# Allegro board WIFI_Rev01_22OCT17_2358.brd
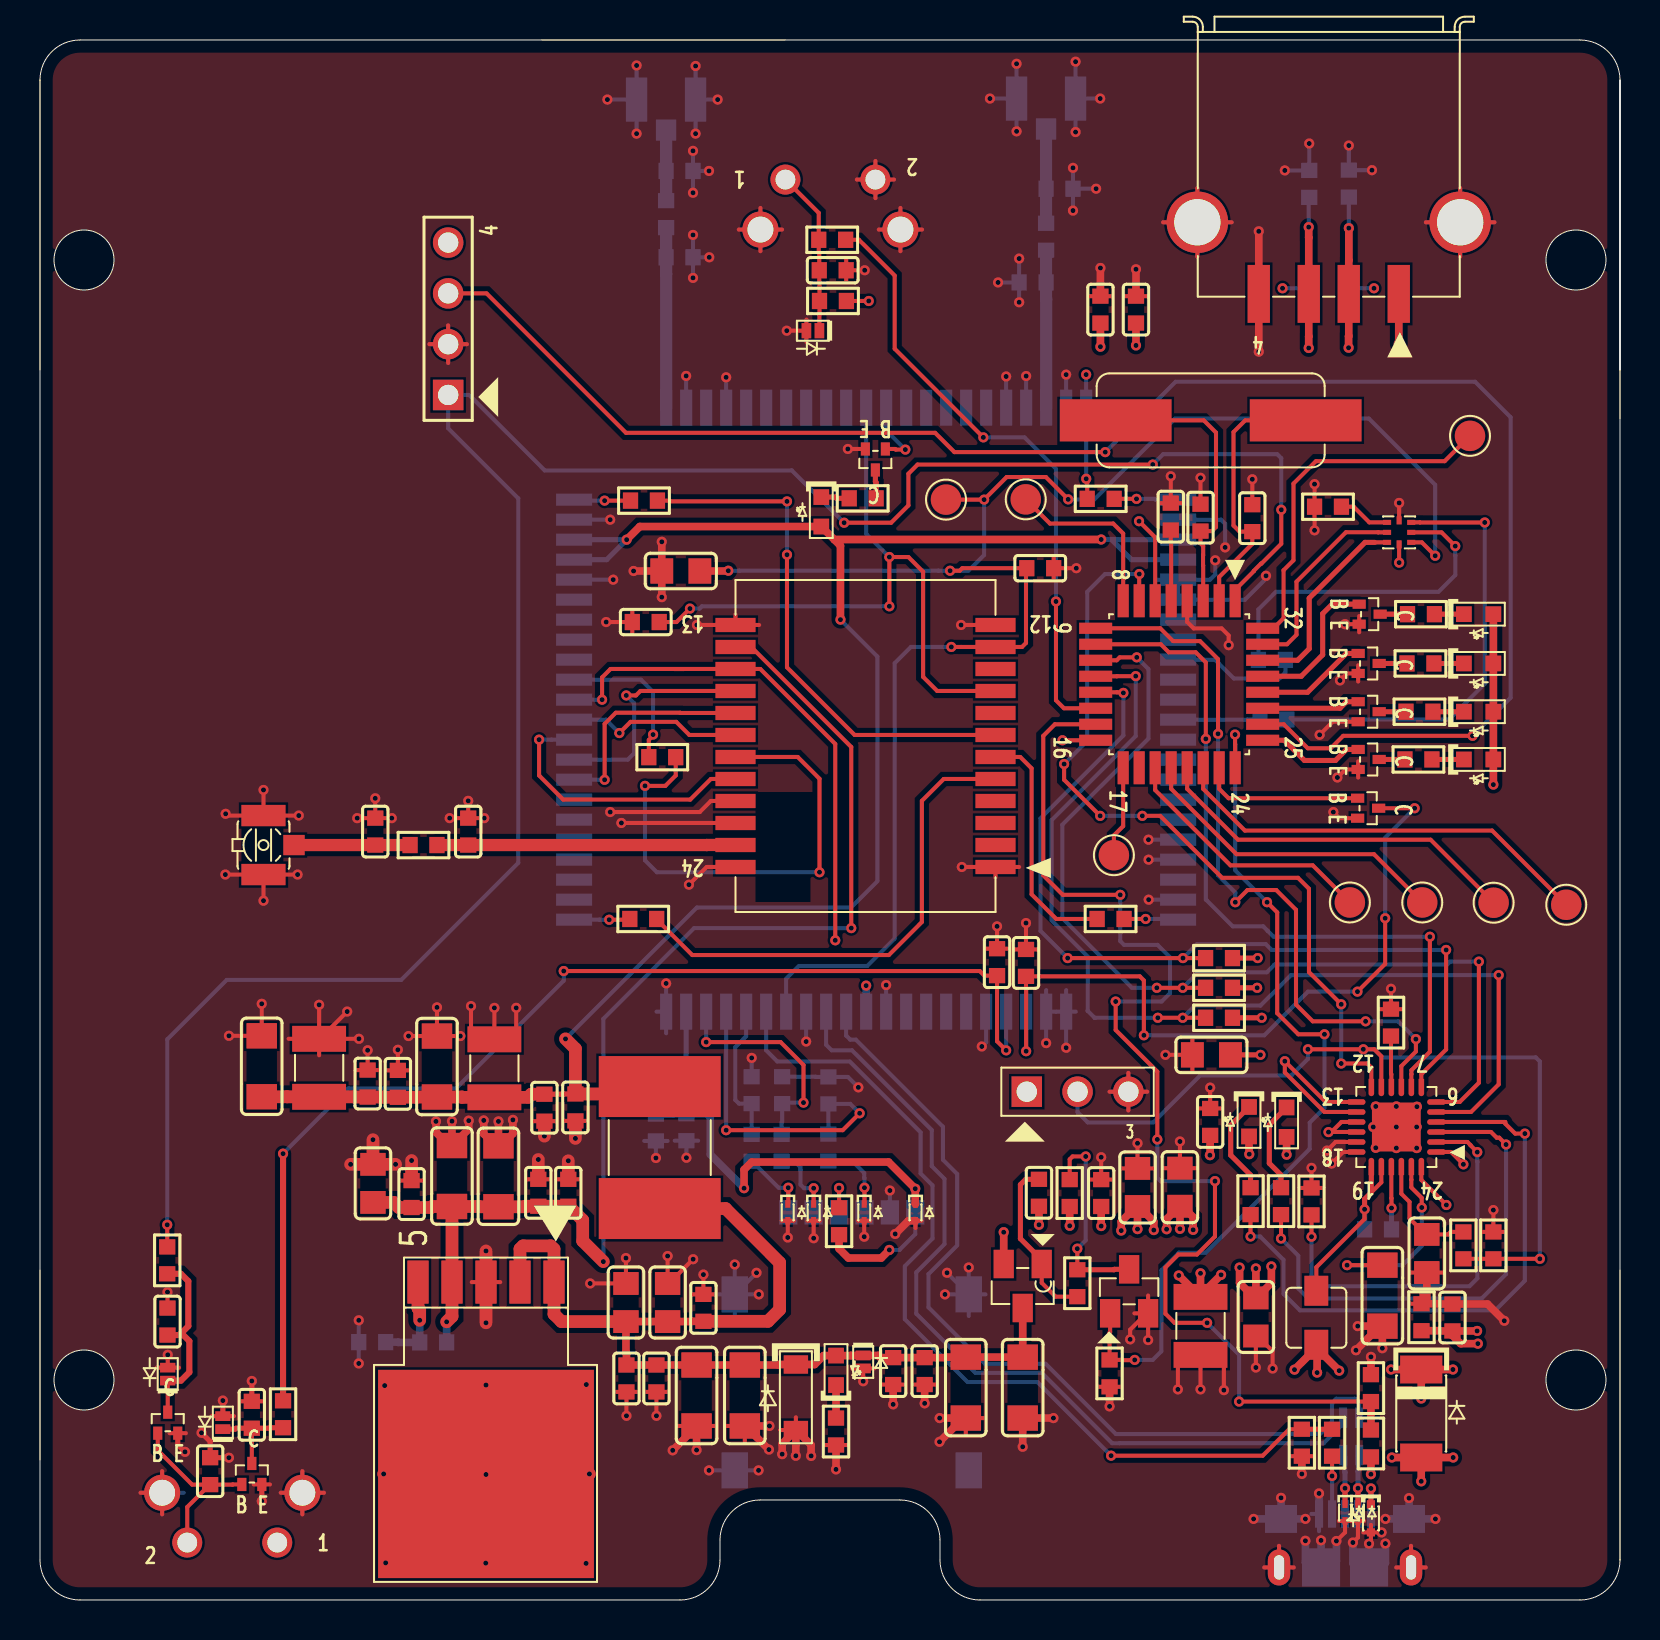
[diagram p0: board, top side]
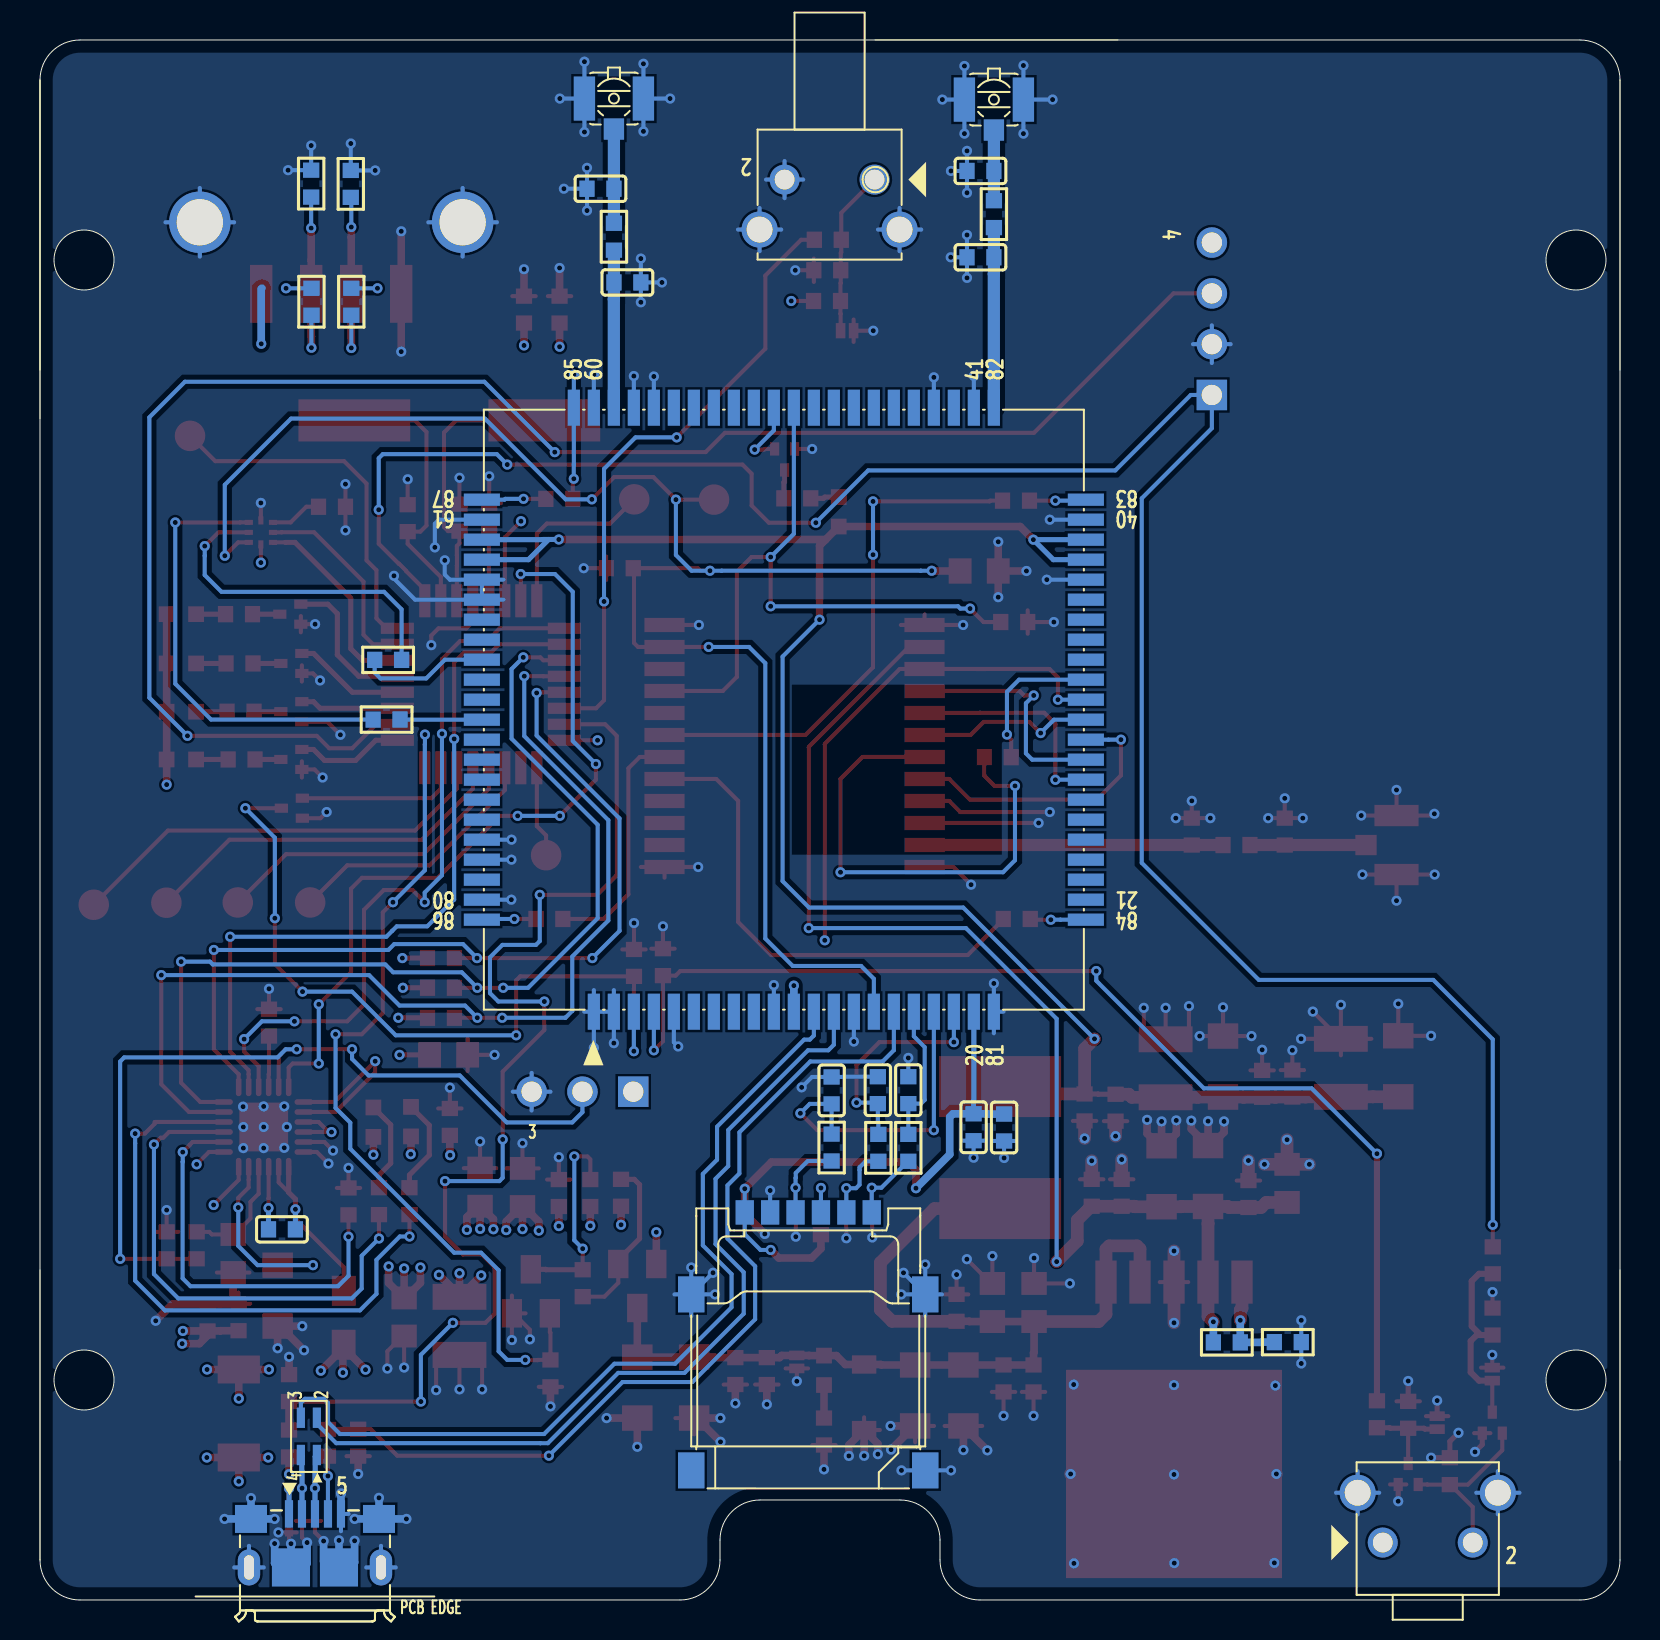
[diagram p1: board, bottom side, seen from below]

Outline 79 x 78 mm; copper layers: TOP, L2_GND, L3_PWR, BOTTOM. Coordinates in mm from the lower left corner of the outline.
Outline path: circle c2.2,67 r1.5 ; circle c2.2,11 r1.5 ; circle c76.8,67 r1.5 ; circle c76.8,11 r1.5 ; 0,76 0,61.5 ; 0,76 0,7 ; 0,76 arc(0.59,77.41) 2,78 77,78 arc(78.41,77.41) 79,76 ; 0,16.5 0,2 arc(0.59,0.59) 2,0 32,0 arc(33.41,0.59) 34,2 34,3 arc(34.59,4.41) 36,5 43,5 arc(44.41,4.41) 45,3 45,2 arc(45.59,0.59) 47,0 77,0 arc(78.41,0.59) 79,2 ; 37.25,78 25.1,78 ; 79,76 79,59.08 ; 79,76 79,61.5 ; 79,76 79,2 ; 79,2 79,16.5

## Design rules (mm)
net group CLK: nets CLK_SIM SD2_CLK USIM_CLK XIN_MCU XOUT_MCU
net group PWR: nets 3V3 BQ_BTST BQ_SW LDO_3V3_ADJ V_SIM7100 VCHARGE_FET VDD_1V8 VIN_SENSE VPP_SIM

## Placement (name value [footprint] x y rotation side)
C1  2.2uF  [C0603]  58.51 23.9 90 top
C2  0.047uF  [C0603]  66.9 18.53 0 bottom
C3  10uF  [C0805]  60.79 14.15 270 top
C4  47uF  [C1210]  58.03 13.71 270 top
C5  1uF  [C0603]  70.62 14.13 90 top
C6  8.2uF  [C1206]  67.12 15.22 270 top
C7  4.7uF  [C0805]  69.34 17.33 270 top
C8  10uF  [C0805]  58.57 27.26 180 top
C9  100uF  [C1206]  49.14 10.62 270 top
C10  100uF  [C1206]  46.29 10.62 270 top
C11  0.1uF  [C0603]  44.23 11.45 270 top
C12  33pF  [C0603]  42.66 11.45 270 top
C13  100uF  [C1206]  35.24 10.23 270 top
C14  100uF  [C1206]  32.83 10.23 270 top
C15  0.1uF  [C0603]  30.82 11.08 270 top
C16  33pF  [C0603]  29.32 11.08 270 top
C17  10uF  [C0805]  57 20.64 90 top
C18  10uF  [C0805]  54.88 20.63 90 top
C19  0.1uF  [C0603]  53.06 20.35 90 top
C20  100uF  [C1206]  20.6 21.2 90 top
C21  100uF  [C1206]  22.92 21.19 90 top
C22  0.1uF  [C0603]  24.92 20.36 90 top
C23  33pF  [C0603]  26.42 20.36 90 top
C24  10uF  [C0805]  29.3 14.87 90 top
C25  10uF  [C0805]  31.38 14.87 90 top
C26  0.1uF  [C0603]  33.17 14.61 90 top
C27  0.1uF  [C0603]  25.22 24.62 270 top
C28  100uF  [C1206]  19.85 26.67 90 top
C30  0.1uF  [C0603]  49.3 31.85 90 top
C31  0.1uF  [C0603]  47.85 31.89 90 top
C32  33pF  [C0603]  26.77 24.63 270 top
C33  47uF  [C1210]  22.72 26.58 90 top
C34  33pF  [C0603]  16.38 25.82 90 top
C35  0.1uF  [C0603]  17.89 25.81 90 top
C36  47uF  [C1210]  13.96 26.61 90 top
C37  100uF  [C1206]  11.09 26.69 90 top
C39  10uF  [C0805]  32.04 51.45 180 top
C40  0.1uF  [C0603]  30.29 48.9 180 top
C41  0.1uF  [C0603]  18.58 20.3 90 top
C42  10uF  [C0805]  16.65 20.83 90 top
C45  22pF  [C0603]  60.62 54.09 90 top
C46  22pF  [C0603]  58.03 54.12 90 top
C47  1uF  [C0603]  56.54 54.17 90 top
C48  1uF  [C0603]  54.8 64.52 90 top
C49  33pF  [C0603]  32.32 23.64 270 bottom
C50  0.1uF  [C0603]  30.8 23.62 270 bottom
C51  33pF  [C0603]  35.58 25.49 90 bottom
C52  33pF  [C0603]  37.11 25.49 90 bottom
C53  33pF  [C0603]  39.42 25.48 90 bottom
C54  0.1uF  [C0603]  6.37 13.92 90 top
C55  0.1uF  [C0603]  10.59 9.26 90 top
C56  22pF  [C0603]  31.98 67.13 0 bottom
C57  22pF  [C0603]  31.98 71.45 0 bottom
C58  22pF  [C0603]  49.63 65.88 180 bottom
C59  22pF  [C0603]  50.98 70.56 0 bottom
C60  0.1uF  [C0603]  8.51 6.44 90 top
C61  22pF  [C0603]  21.41 38.42 90 top
C62  22pF  [C0603]  16.76 38.42 90 top
C63  0.1uF  [C0603]  39.64 66.49 0 top
C64  0.1uF  [C0603]  49.95 20.36 90 top
C65  0.1uF  [C0603]  50.01 51.59 0 top
C66  0.1uF  [C0603]  53.02 64.52 90 top
D1  RED  [LED0603]  62.33 23.89 90 top
D2  RED  [LED0603]  60.45 23.92 90 top
D3  RED  [LED0603]  39.8 11.48 270 top
D4  MMSZ5231BT1G  [DIO_SOD-123_1M35]  37.79 10.14 90 top
D5  BLUE  [LED0603]  71.93 42.03 180 top
D6  BLUE  [LED0603]  71.93 44.41 180 top
D7  BLUE  [LED0603]  71.93 46.83 180 top
D8  BLUE  [LED0603]  71.93 49.29 180 top
D9  BLUE  [LED0603]  39.06 54.41 90 top
D10  PMEG3030EP,115  [DIO_SOD128_1M1]  69.06 9.32 90 top
FB1  270@100MHz  [FB2220]  30.99 22.62 90 top
HDR1  HDR_1X3_2M54  [HDR1X3_2M54_7M62X2M41X8M58_TH]  49.34 25.42 0 top
HDR2  HDR_1X4_2M54  [HDR1X4_2M54_10M16X2M41X8M58_TH]  20.41 60.25 90 top
J1  87583-3010RPALF  [CONN-TH2_87583_FCI]  64.44 65.31 180 top
J2  10118193-0001LF  [CONN-TH2_10118193_FCI]  65.25 1.63 180 bottom
J3  NANO_SIM_RYSCOON  [NANOSIM_RYSCOON]  40.59 15.28 180 bottom
J4  RECE.20279.001E.01  [CONN-SM2_RECE_TAOGLAS]  31.3 75.02 270 bottom
J5  RECE.20279.001E.01  [CONN-SM2_RECE_TAOGLAS]  50.3 75.07 270 bottom
J6  RECE.20279.001E.01  [CONN-SM2_RECE_TAOGLAS]  11.18 37.75 0 top
L1  1uH  [L_2M7_3M0X3M0X2M0]  63.82 14.11 270 top
Q2  AO3401A  [SOT-23-3_3M1X1M8X1M28]  49.14 15.7 180 top
Q3  BSS138  [SOT-23-3_2M92X1M3X1M2]  54.46 15.43 0 top
Q4  DTC123JEBTL  [TRAN_SC-89_0M85]  6.39 8.87 0 top
Q5  DTC123JEBTL  [TRAN_SC-89_0M85]  66.43 42.03 270 top
Q6  DTC123JEBTL  [TRAN_SC-89_0M85]  66.43 44.41 270 top
Q7  DTC123JEBTL  [TRAN_SC-89_0M85]  66.43 46.83 270 top
Q8  DTC123JEBTL  [TRAN_SC-89_0M85]  66.48 49.29 270 top
Q9  DTC123JEBTL  [TRAN_SC-89_0M85]  10.59 6.3 0 top
Q10  DTC123JEBTL  [TRAN_SC-89_0M85]  66.41 39.59 270 top
Q11  DTC123JEBTL  [TRAN_SC-89_0M85]  41.77 57.03 180 top
R1  75K  [R0603]  63.44 64.91 270 bottom
R2  51K  [R0603]  65.44 70.82 270 bottom
R3  51K  [R0603]  63.46 70.81 270 bottom
R4  0  [R0603]  64.6 7.86 270 top
R5  0  [R0603]  63.09 7.86 270 top
R6  43K  [R0603]  65.43 64.91 270 bottom
R9  330K  [R0603]  66.55 10.59 90 top
R10  470  [R0603]  60.53 19.94 270 top
R11  470  [R0603]  62.05 19.94 270 top
R12  10K  [R0603]  58.95 29.11 180 top
R13  10K  [R0603]  58.95 30.61 180 top
R14  10K  [R0603]  58.95 32.1 180 top
R16  5.62K  [R0603]  71.17 17.73 270 top
R18  33K  [R0603]  72.67 17.73 90 top
R19  0  [R0603]  63.58 19.93 90 top
R22  470  [R0603]  39.8 8.42 270 top
R23  10K  [R0603]  51.48 20.35 90 top
R26  100K  [R0603]  51.87 15.84 90 top
R27  33K  [R0603]  19.66 12.88 180 bottom
R28  20K  [R0603]  16.61 12.89 180 bottom
R29  0  [R0603]  61.59 47.01 0 bottom
R30  0  [R0603]  61.67 44.02 180 bottom
R31  0  [R0603]  64.4 54.66 180 top
R32  51  [R0603]  39.42 22.62 270 bottom
R33  0  [R0603]  39.95 18.94 90 top
R34  51  [R0603]  37.08 22.61 270 bottom
R35  51  [R0603]  35.58 22.61 270 bottom
R36  0  [R0603]  6.36 16.98 270 top
R37  200  [R0603]  68.92 42.03 180 top
R38  200  [R0603]  68.97 44.41 180 top
R39  200  [R0603]  69.02 46.83 180 top
R40  200  [R0603]  69.05 49.29 180 top
R41  0  [R0603]  12.15 9.29 270 top
R42  0  [R0603]  31.3 69.29 90 bottom
R43  200  [R0603]  41.13 55.08 0 top
R44  0  [R0603]  50.3 68.16 90 bottom
R45  0  [R0603]  19.18 37.75 180 top
R46  33K  [R0603]  39.65 64.95 180 top
R47  0  [R0603]  39.61 68.01 180 top
R48  150K  [R0603]  66.55 7.83 90 top
R49  330K  [R0603]  69.07 14.14 90 top
R50  160  [R0603]  67.55 28.87 90 top
R51  100K  [R0603]  53.48 11.33 270 top
R52  0  [R0603]  53.03 55.06 0 top
R53  0  [R0603]  31.11 42.14 0 top
R54  0  [R0603]  53.53 34.05 180 top
R55  0  [R0603]  30.2 54.97 0 top
R56  0  [R0603]  30.16 34.05 0 top
SW1  BTN_SPST  [SW-TH4_1825027-5_TE]  9.61 2.87 180 bottom
SW2  BTN_SPST  [SW-TH4_TL1105SF160Q_TE]  39.52 71.02 0 bottom
TP1  -  [TP]  45.3 55.02 0 top
TP2  -  [TP]  49.29 55.03 0 top
TP3  -  [TP]  76.31 34.76 0 top
TP4  -  [TP]  72.68 34.86 0 top
TP5  -  [TP]  69.11 34.88 0 top
TP6  -  [TP]  65.49 34.88 0 top
TP7  -  [TP]  53.69 37.24 0 top
TP8  -  [TP]  71.5 58.21 0 top
TVS1  PESD12VS1UB,115  [TVS_SOD-523_0M65]  66.55 4.08 90 top
TVS2  ESD9M5.0ST5G  [TVS_SOD-923_0M4]  65.9 4.37 270 top
TVS3  ESD9M5.0ST5G  [TVS_SOD-923_0M4]  65.25 4.37 270 top
TVS4  PESD5V0S1BL,315  [TVS_SOD-882_1M1]  41.16 11.9 90 top
TVS5  ESD9M5.0ST5G  [TVS_SOD-923_0M4]  38.68 19.38 270 top
TVS6  ESD9M5.0ST5G  [TVS_SOD-923_0M4]  41.21 19.38 270 top
TVS7  ESD9M5.0ST5G  [TVS_SOD-923_0M4]  43.78 19.38 270 top
TVS8  ESD9M5.0ST5G  [TVS_SOD-923_0M4]  37.39 19.38 270 top
TVS9  PESD5V0S1BL,315  [TVS_SOD-882_1M1]  6.39 11.29 270 top
TVS10  PESD5V0S1BL,315  [TVS_SOD-882_1M1]  9.14 8.87 270 top
TVS11  PESD5V0S1BL,315  [TVS_SOD-882_1M1]  38.65 63.46 0 top
U1  DLW21SR670HQ2L  [FL0805_1M4]  65.56 8.18 90 bottom
U2  BQ24296RGET  [VQFN24_0M5_4M0X4M0X1M0]  67.82 23.65 180 top
U4  SPX29302T5-L/TR  [TO263-5]  22.3 6.3 90 top
U5  SIM7100C  [MODULE_SIM7100C]  41.81 44.52 90 bottom
U6  W57  [MODULE_W57]  41.27 42.7 180 top
U7  FXLA102L8X  [MICROPAK8_0M5_1M6X1M6X0M55]  67.96 53.38 90 top
U8  STM8S103K3T6C  [LQFP32_0M8_7M0X7M0X1M6]  56.96 45.79 270 top
Y1  ABLS-8.000MHZ-B4-T  [XTAL2_HC49US_4M2]  58.53 58.98 180 top

## Library data of the parts
C1 = CAP_2.2uF
C2 = CAP_0.047uF_09012017
C3 C8 C17 C18 C24 C25 C39 C42 = CAP_10uF
C4 C33 C36 = CAP_47uF
C5 C47 C48 = CAP_1uF
C6 = CAP_8.2uF_09012017
C7 = CAP_4.7uF
C9 C10 C13 C14 C20 C21 C28 C37 = CAP_100uF
C11 C15 C19 C22 C26 C27 C30 C31 C35 C40 C41 C50 C54 C55 C60 C63-C66 = CAP_100nF
C12 C16 C23 C32 C34 C49 C51-C53 = CAP_33pF
C45 C46 C56-C59 C61 C62 = CAP_22pF
D1-D3 = LED_LTST-C193KRKT-5A
D4 = DIODE_ZENER_5V1
D5-D9 = LED_LTST-C193TBKT-5A
D10 = DIO_PMEG3030EP_SOD128
FB1 = FB2220_270OHM_4A
HDR1 = HDR_1X3_68000
HDR2 = HDR_1X4_68000
J1 = CONN_USB_TYPEA
J2 = CONN_USB
J3 = CONN_SIM
J4-J6 = CONN_AT
L1 = IND_1.5uH
Q2 = FET_P_AO3401A_SOT23
Q3 = FET_N_BSS138_SOT23
Q4-Q11 = BJT_NPN_DTC143ZEBTL
R1 = RES_75K_N
R2 R3 = RES_51K_N
R4 R5 R19 R29-R31 R33 R36 R41 R42 R44 R45 R47 R52-R56 = RES_0
R6 = RES_43K_N
R9 R49 = R0402_330K_1/16W_1%
R10 R11 R22 = RES_470_09012017
R12-R14 R23 = RES_10K
R16 = RES_5.62K
R18 R27 R46 = RES_33K_1%
R26 R51 = R0402_100K_1/10W_5%
R28 = RES_20K
R32 R34 R35 = RES_51
R37-R40 R43 = RES_200_09012017
R48 = RES_150K_1%
R50 = RES_160_1%
SW1 = BTN4_SPST_TH_1825027-5
SW2 = BTN4_SPST_TH_TL1105SF160Q
TP1-TP8 = TP
TVS1 = TVS_PESD12VS1UB
TVS2 TVS3 TVS5-TVS8 = TVS_ESD9M5.0S-D
TVS4 TVS9-TVS11 = TVS_PESD5V0S1BL
U1 = FILTER_CHOKES_DLW21SN670SQ2
U2 = IC_BQ24296
U4 = IC_SPX29302T5-L
U5 = IC_SIM7100
U6 = IC_W57
U7 = IC_FXLA102
U8 = IC_STM8S103K3T6C
Y1 = XTAL_8MHz

## Footprints (pads in the part's own frame, mm; a bottom-side part is the same pattern mirrored in y, then rotated)
C0603
  rect 0.762x0.813 smd: 1(-0.673,0) 2(0.673,0)
C0805
  rect 1.143x1.27 smd: 1(-0.953,0) 2(0.953,0)
C1206
  rect 1.27x1.524 smd: 1(-1.524,0) 2(1.524,0)
C1210
  rect 1.295x2.692 smd: 1(-1.45,0) 2(1.45,0)
CONN-SM2_RECE_TAOGLAS
  rect 2.21x1.067 smd: 1(0,1.475) 3(0,-1.475)
  rect 1.067x1.016 smd: 2(1.525,0)
CONN-TH2_87583_FCI
  rect 1.118x2.896 smd: 1(-3.5,0) 2(-1,0) 3(1,0) 4(3.5,0)
  round 3.073 hole 2.311: 5(-6.57,-3.58) 6(6.57,-3.58)
CONN-TH2_10118193_FCI
  rect 0.406x1.372 smd: 1(-1.3,2.675) 2(-0.65,2.675) 3(0,2.675) 4(0.65,2.675) 5(1.3,2.675)
  rect 1.6x1.397 smd: 6(-3.2,2.425) 7(3.2,2.425)
  rect 1.905x1.905 smd: 8(-1.2,0) 9(1.2,0)
  oval 1.118x1.803 hole 0.508x1.219: 10(-3.3,0) 11(3.3,0)
DIO_SOD128_1M1
  rect 1.397x2.108 smd: A(-2.2,0) K(2.2,0)
DIO_SOD-123_1M35
  rect 0.914x1.219 smd: A(-1.638,0) K(1.638,0)
FB2220
  rect 3.048x6.096 smd: 1(-3.05,0) 2(3.05,0)
FL0805_1M4
  rect 1.016x0.406 smd: 1(-0.931,-0.4) 2(0.931,-0.4) 3(0.931,0.4) 4(-0.931,0.4)
HDR1X3_2M54_7M62X2M41X8M58_TH
  rect 1.524x1.524 hole 1.016: 1(0,0)
  round 1.524 hole 1.016: 2(2.54,0) 3(5.08,0)
HDR1X4_2M54_10M16X2M41X8M58_TH
  rect 1.524x1.524 hole 1.016: 1(0,0)
  round 1.524 hole 1.016: 2(2.54,0) 3(5.08,0) 4(7.62,0)
L_2M7_3M0X3M0X2M0
  rect 1.499x1.194 smd: 1(-1.35,0) 2(1.35,0)
LED0603
  rect 0.787x0.787 smd: A(-0.737,0) K(0.737,0)
LQFP32_0M8_7M0X7M0X1M6
  rect 1.651x0.559 smd: 1(-4.175,2.8) 2(-4.175,2) 3(-4.175,1.2) 4(-4.175,0.4) 5(-4.175,-0.4) 6(-4.175,-1.2) 7(-4.175,-2) 8(-4.175,-2.8) 17(4.175,-2.8) 18(4.175,-2) 19(4.175,-1.2) 20(4.175,-0.4) 21(4.175,0.4) 22(4.175,1.2) 23(4.175,2) 24(4.175,2.8)
  rect 0.559x1.651 smd: 9(-2.8,-4.175) 10(-2,-4.175) 11(-1.2,-4.175) 12(-0.4,-4.175) 13(0.4,-4.175) 14(1.2,-4.175) 15(2,-4.175) 16(2.8,-4.175) 25(2.8,4.175) 26(2,4.175) 27(1.2,4.175) 28(0.4,4.175) 29(-0.4,4.175) 30(-1.2,4.175) 31(-2,4.175) 32(-2.8,4.175)
MICROPAK8_0M5_1M6X1M6X0M55
  rect 0.254x0.406 smd: 1(-0.5,-0.605) 2(0,-0.605) 3(0.5,-0.605) 5(0.5,0.605) 6(0,0.605) 7(-0.5,0.605)
  rect 0.406x0.254 smd: 4(0.6,0) 8(-0.6,0)
MODULE_SIM7100C
  rect 1.803x0.61 smd: 1(-15.1,9.5) 2(-15.1,8.5) 3(-15.1,7.5) 4(-15.1,6.5) 5(-15.1,5.5) 6(-15.1,4.5) 7(-15.1,3.5) 8(-15.1,2.5) 9(-15.1,1.5) 10(-15.1,0.5) 11(-15.1,-0.5) 12(-15.1,-1.5) 13(-15.1,-2.5) 14(-15.1,-3.5) 15(-15.1,-4.5) 16(-15.1,-5.5) 17(-15.1,-6.5) 18(-15.1,-7.5) 19(-15.1,-8.5) 20(-15.1,-9.5) 41(15.1,-9.5) 42(15.1,-8.5) 43(15.1,-7.5) 44(15.1,-6.5) 45(15.1,-5.5) 46(15.1,-4.5) 47(15.1,-3.5) 48(15.1,-2.5) 49(15.1,-1.5) 50(15.1,-0.5) 51(15.1,0.5) 52(15.1,1.5) 53(15.1,2.5) 54(15.1,3.5) 55(15.1,4.5) 56(15.1,5.5) 57(15.1,6.5) 58(15.1,7.5) 59(15.1,8.5) 60(15.1,9.5) 81(-15.1,-10.5) 82(15.1,-10.5) 85(15.1,10.5)
  rect 0.61x1.803 smd: 21(-9.5,-15.1) 22(-8.5,-15.1) 23(-7.5,-15.1) 24(-6.5,-15.1) 25(-5.5,-15.1) 26(-4.5,-15.1) 27(-3.5,-15.1) 28(-2.5,-15.1) 29(-1.5,-15.1) 30(-0.5,-15.1) 31(0.5,-15.1) 32(1.5,-15.1) 33(2.5,-15.1) 34(3.5,-15.1) 35(4.5,-15.1) 36(5.5,-15.1) 37(6.5,-15.1) 38(7.5,-15.1) 39(8.5,-15.1) 40(9.5,-15.1) 61(9.5,15.1) 62(8.5,15.1) 63(7.5,15.1) 64(6.5,15.1) 65(5.5,15.1) 66(4.5,15.1) 67(3.5,15.1) 68(2.5,15.1) 69(1.5,15.1) 70(0.5,15.1) 71(-0.5,15.1) 72(-1.5,15.1) 73(-2.5,15.1) 74(-3.5,15.1) 75(-4.5,15.1) 76(-5.5,15.1) 77(-6.5,15.1) 78(-7.5,15.1) 79(-8.5,15.1) 80(-9.5,15.1) 83(10.5,-15.1) 84(-10.5,-15.1) 86(-10.5,15.1) 87(10.5,15.1)
MODULE_W57
  rect 2.007x0.711 smd: 1(-6.5,6.05) 2(-6.5,4.95) 3(-6.5,3.85) 4(-6.5,2.75) 5(-6.5,1.65) 6(-6.5,0.55) 7(-6.5,-0.55) 8(-6.5,-1.65) 9(-6.5,-2.75) 10(-6.5,-3.85) 11(-6.5,-4.95) 12(-6.5,-6.05) 13(6.5,-6.05) 14(6.5,-4.95) 15(6.5,-3.85) 16(6.5,-2.75) 17(6.5,-1.65) 18(6.5,-0.55) 19(6.5,0.55) 20(6.5,1.65) 21(6.5,2.75) 22(6.5,3.85) 23(6.5,4.95) 24(6.5,6.05)
NANOSIM_RYSCOON
  rect 0.914x1.219 smd: C1(-3.175,4.1) C2(-0.635,4.1) C3(1.905,4.1) C5(-1.905,4.1) C6(0.635,4.1) C7(3.175,4.1)
  rect 1.321x1.803 smd: G1(-5.85,0) G2(5.85,0) G3(5.85,-8.8) SW(-5.85,-8.8)
R0603
  rect 0.762x0.813 smd: 1(-0.673,0) 2(0.673,0)
SOT-23-3_2M92X1M3X1M2
  rect 1.016x1.422 smd: D(0,1.1) G(-0.95,-1.1) S(0.95,-1.1)
SOT-23-3_3M1X1M8X1M28
  rect 1.016x1.422 smd: D(0,1.1) G(-0.95,-1.1) S(0.95,-1.1)
SW-TH4_1825027-5_TE
  round 1.499 hole 0.991: 1(-2.25,0) 2(2.25,0)
  round 1.803 hole 1.295: 3(-3.505,2.489) 4(3.505,2.489)
SW-TH4_TL1105SF160Q_TE
  round 1.499 hole 0.991: 1(-2.25,0) 2(2.25,0)
  round 1.803 hole 1.295: 3(-3.5,2.5) 4(3.5,2.5)
TO263-5
  rect 2.159x1.067 smd: 1(9.593,-3.4) 2(9.593,-1.7) 3(9.593,0) 4(9.593,1.7) 5(9.593,3.4)
  rect 10.414x10.795 smd: 6(0,0)
TP
  round 1.524 smd: 1(0,0)
TRAN_SC-89_0M85
  rect 0.457x0.66 smd: B(-0.5,-0.525) C(0,0.525) E(0.5,-0.525)
TVS_SOD-523_0M65
  rect 0.406x0.406 smd: 1(0.7,0) 2(-0.7,0)
TVS_SOD-882_1M1
  rect 0.483x0.762 smd: 1(0.325,0) 2(-0.325,0)
TVS_SOD-923_0M4
  rect 0.381x0.254 smd: 1(-0.42,0) 2(0.42,0)
VQFN24_0M5_4M0X4M0X1M0
  custom 0.864x0.279 smd: 1(-1.975,1.25) 2(-1.975,0.75) 3(-1.975,0.25) 4(-1.975,-0.25) 5(-1.975,-0.75) 6(-1.975,-1.25) 13(1.975,-1.25) 14(1.975,-0.75) 15(1.975,-0.25) 16(1.975,0.25) 17(1.975,0.75) 18(1.975,1.25)
  custom 0.279x0.864 smd: 7(-1.25,-1.975) 8(-0.75,-1.975) 9(-0.25,-1.975) 10(0.25,-1.975) 11(0.75,-1.975) 12(1.25,-1.975) 19(1.25,1.975) 20(0.75,1.975) 21(0.25,1.975) 22(-0.25,1.975) 23(-0.75,1.975) 24(-1.25,1.975)
  rect 2.438x2.438 smd: 25(0,0)
XTAL2_HC49US_4M2
  rect 5.588x2.108 smd: 1(-4.75,0) 2(4.75,0)

## Nets
3V3: C20.1 C21.1 C22.1 C23.1 C41.1 C42.1 R27.1 U4.4(OUT) U6.14(WLAN_3V3)
GND: C1.2 C3.2 C4.2 C5.2 C6.2 C7.2 C8.2 C9.2 C10.2 C11.2 C12.2 C13.2 C14.2 C15.2 C16.2 C17.2 C18.2 C19.2 C20.2 C21.2 C22.2 C23.2 C24.2 C25.2 C26.2 C27.2 C28.2 C30.2 C31.2 C32.2 C33.2 C34.2 C35.2 C36.2 C37.2 C39.2 C40.2 C41.2 C42.2 C45.2 C46.2 C47.2 C48.2 C49.2 C50.2 C51.2 C52.2 C53.2 C54.2 C55.2 C56.2 C57.2 C58.2 C59.2 C60.2 C61.2 C62.2 C63.2 C65.2 C66.2 D4.A HDR1.3 HDR2.2 J1.4 J1.5(SHIELD_1) J1.6(SHIELD_2) J2.5 J2.6 J2.7 J2.8 J2.9 J2.10 J2.11 J3.C5(GND) J3.G1(GND1) J3.G2(GND2) J3.G3(GND3) J4.1(GND_1) J4.3(GND_3) J5.1(GND_1) J5.3(GND_3) J6.1(GND_1) J6.3(GND_3) Q3.S Q4.E(GND) Q5.E(GND) Q6.E(GND) Q7.E(GND) Q8.E(GND) Q9.E(GND) Q10.E(GND) Q11.E(GND) R2.1 R3.1 R5.2 R9.2 R18.2 R19.2 R22.2 R28.2 R31.2 R49.2 R50.2 R51.2 SW1.3 SW1.4 SW2.2 SW2.3 SW2.4 TVS1.2 TVS2.2 TVS3.2 TVS4.2 TVS5.2 TVS6.2 TVS7.2 TVS8.2 TVS9.2 TVS10.2 TVS11.2 U2.17(PGND_1) U2.18(PGND_2) U2.25(PAD) U4.3(GND) U4.6(PAD) U5.1(GND_1) U5.2(GND_2) U5.5(GND_3) U5.10(GND_4) U5.14(GND_5) U5.37(GND_6) U5.40(GND_7) U5.41(GND_8) U5.43(GND_9) U5.57(GND_10) U5.58(GND_11) U5.60(GND_12) U5.61(GND_13) U5.64(GND_14) U5.65(GND_15) U5.77(GND_16) U5.78(GND_17) U5.80(GND_18) U5.81(GND_19) U6.1(GND_1) U6.12(GND_2) U6.13(GND_6) U6.21(GND_5) U6.22(GND_4) U6.24(GND_3) U7.4(GND) U8.4(VSS)
VBAT: C8.1 C48.1 C66.1 HDR1.1 HDR2.4 R12.1 R13.1 R14.1 R46.1 SW1.1 U2.13(BAT_1) U2.14(BAT_2) U7.8(VCCB) U8.6(VDD) U8.16(PB0)
VDD_1V8: C39.1 C65.1 TP1.1(TP) U5.15(VDD_1V8) U6.11(VIO) U7.1(VCCA)
VIN_SENSE: R9.1 R48.2 U8.15(PB1)
BJT_NETLIGHT: Q11.C(OUT) R43.2
BOOT_CFG0: R52.1 U5.85(B00T_CFG0)
BOOT_CFG1: R52.2 U5.87(B00T_CFG1)
BQ_BTST: C2.2 U2.21(BTST)
BQ_CE: U2.9(C\E\) U8.9(PB7)
BQ_ILIM: R50.1 U2.10(ILIM)
BQ_INT: R14.2 U2.7(INT) U8.13(PB3)
BQ_OTG: U2.8(OTG) U8.10(PB6)
BQ_PG: R11.2 U2.3(P\G\)
BQ_PG_LED: D1.K(CATHODE) R11.1
BQ_PMID: C6.1 U2.23(PMID)
BQ_PSEL: R19.1 U2.2(PSEL)
BQ_QON: U2.12(QON) U8.7(PA3)
BQ_REGN: C7.1 R16.1 U2.22(REGN)
BQ_SCL: R12.2 U2.5(SCL) U8.12(PB4)
BQ_SDA: R13.2 U2.6(SDA) U8.11(PB5)
BQ_STAT: R10.2 U2.4(STAT)
BQ_STAT_LED: D2.K(CATHODE) R10.1
BQ_SW: C2.1 L1.1 U2.19(SW_1) U2.20(SW_2)
BQ_TS: HDR1.2 R16.2 R18.1 U2.11(TS)
CHAR_OTG_DN: J1.3 R1.2 R3.2
CHAR_OTG_DP: J1.2 R2.2 R6.2
CLK_SIM: J3.C3(CLK) R34.2 TVS5.1
DIV_ANT: C58.1 R44.1 U5.59(AUX_ANT)
FET_CAP_G: C64.2 Q2.G R26.1
FET_PW_G: Q3.D R23.2 R26.2
FXLA_OE: R31.1 U7.5(OE)
IO_SIM: J3.C7(I/O) R35.2 TVS8.1
LDO_3V3_ADJ: R27.2 R28.1 U4.5(ADJ)
LED1: Q5.B(IN) U8.25(PD0)
LED1_BJT: Q5.C(OUT) R37.2
LED1_K: D5.K(CATHODE) R37.1
LED2: Q6.B(IN) U8.27(PD2)
LED2_BJT: Q6.C(OUT) R38.2
LED2_K: D6.K(CATHODE) R38.1
LED3: Q7.B(IN) U8.28(PD3)
LED3_BJT: Q7.C(OUT) R39.2
LED3_K: D7.K(CATHODE) R39.1
LED4: Q8.B(IN) U8.29(PD4)
LED4_BJT: Q8.C(OUT) R40.2
LED4_K: D8.K(CATHODE) R40.1
LED_NETLIGHT: D9.K(CATHODE) R43.1
LED_PW: D3.K(CATHODE) R22.1
LTE_ACTIVE: R54.2 U6.6(LTE_ACTIVE)
LTE_FRAME_SYNC: R56.2 U6.5(LTE_FRAME_SYNC)
LTE_WLAN_PRIORITY: R55.2 U6.7(LTE_WLAN_PRIORITY)
MAIN_ANT: C56.1 R42.1 U5.82(MAIN_ANT)
NETLIGHT: Q11.B(IN) U5.51(NETLIGHT)
PC2_MCU: TP6.1(TP) U8.19(PC2)
PC3_MCU: TP5.1(TP) U8.20(PC3)
PC4_MCU: TP4.1(TP) U8.21(PC4)
PC5_MCU: TP3.1(TP) U8.22(PC5)
PD7_MCU: TP8.1(TP) U8.32(PD7)
PE5_MCU: TP7.1(TP) U8.17(PE5)
PF4_MCU: TP2.1(TP) U8.8(PF4)
POWER_MCU: R47.1 U8.14(PB2)
PW_BUTTON: C63.1 R46.2 R47.2 SW2.1 TVS11.1
PWRKEY: C30.1 Q10.C(OUT) U5.3(PWRKEY)
PWRKEY_MCU: Q10.B(IN) U8.23(PC6)
RESET: C31.1 R41.1 U5.4(RESET)
RESET_MCU: HDR2.1 R36.1 U8.1(NRST)
RF_ANT: C61.1 R45.1 U6.23(RF_ANT)
RST_BUTTON: C60.1 Q4.B(IN) Q9.B(IN) SW1.2
RST_MCU: C54.1 Q4.C(OUT) R36.2 TVS9.1
RST_SIM: J3.C2(RST) R32.2 TVS6.1
RST_SIM7100: C55.1 Q9.C(OUT) R41.2 TVS10.1
RX_1V8: R29.1 U7.2(A0)
RX_3V3: U7.6(B1) U8.31(PD6)
SD2_CLK: R53.2 U6.19(SDIO_CLK)
SD2_CMD: U5.29(KBR0) U6.20(SDIO_CMD)
SD2_D0: U5.30(KBR2) U6.18(SDIO_D0)
SD2_D1: U5.27(KBC1) U6.17(SDIO_D1)
SD2_D2: U5.28(KBC0) U6.16(SDIO_D2)
SD2_D3: U5.31(KBC2) U6.15(SDIO_D3)
SIG_DIV_ANT: C59.1 J5.2(SIGNAL) R44.2
SIG_MAIN_ANT: C57.1 J4.2(SIGNAL) R42.2
SIG_WIFI_ANT: C62.1 J6.2(SIGNAL) R45.2
SIM7100_COEX1: R55.1 U5.83(COEX1)
SIM7100_COEX2: R56.1 U5.84(COEX2)
SIM7100_COEX3: R54.1 U5.86(COEX3)
SWIM_MCU: HDR2.3 U8.26(PD1)
TX_1V8: R30.1 U7.3(A1)
TX_3V3: U7.7(B0) U8.30(PD5)
UART_RX: R29.2 U5.68(RXD)
UART_TX: R30.2 U5.71(TXD)
USB_DN: U1.3 U5.12(USB_DN)
USB_DN_CONN: J2.2 TVS2.1 U1.4
USB_DP: U1.2 U5.13(USB_DP)
USB_DP_CONN: J2.3 TVS3.1 U1.1
USB_ID: R4.1 R5.1 U5.16(USB_ID)
USB_ID_CONN: J2.4 R4.2
USB_VDD5V: D10.A J2.1 R48.1 TVS1.1 U5.11(USB_VBUS)
USIM_CLK: C52.1 R34.1 U5.19(USIM_CLK)
USIM_DATA: C51.1 R35.1 U5.17(USIM_DATA)
USIM_RST: C53.1 R32.1 U5.18(USIM_RST)
USIM_VDD: C49.1 C50.1 J3.C1(VCC) R33.1 TVS7.1 U5.20(USIM_VDD)
V_SIM7100: C27.1 C28.1 C32.1 C33.1 C34.1 C35.1 C36.1 C37.1 D9.A(ANODE) FB1.2 U5.38(VBAT_1) U5.39(VBAT_2) U5.62(VBAT_3) U5.63(VBAT_4)
VCAP_MCU: C47.1 U8.5(VCAP)
VCHARGE_EN: Q3.G R51.1 U8.24(PC7)
VCHARGE_FET: C9.1 C10.1 C11.1 C12.1 C13.1 C14.1 C15.1 C16.1 C24.1 C25.1 C26.1 D3.A(ANODE) D4.K FB1.1 Q2.D TVS4.1 U4.1(EN) U4.2(IN)
VCHARGE_OUT: C1.1 C3.1 C4.1 C17.1 C18.1 C19.1 C64.1 D1.A(ANODE) D2.A(ANODE) D5.A(ANODE) D6.A(ANODE) D7.A(ANODE) D8.A(ANODE) L1.2 Q2.S R23.1 U2.15(SYS_1) U2.16(SYS_2)
VPP_SIM: J3.C6(VPP) R33.2
VUSB_IN: C5.1 D10.K J1.1 R1.1 R6.1 R49.1 U2.1(VBUS_1) U2.24(VBUS_2)
WLAN_RST_N: C40.1 U5.50(GPIO43) U6.9(WLAN_RESET_N)
XIN_MCU: C45.1 U8.2(OSCIN) Y1.1
XOUT_MCU: C46.1 U8.3(OSCOUT) Y1.2
N19042876: R53.1 U5.32(KBC3)

Pads without a net: J3 SW; U5 6 7 8 9 21 22 23 24 25 26 33 34 35 36 42 44 45 46 47 48 49 52 53 54 55 56 66 67 69 70 72 73 74 75 76 79; U6 2 3 4 8 10; U8 18

## Via types
v1: diameter 0.508, hole 0.254, TOP to BOTTOM, 397 vias

## Routing (per net, layer and track width the routed paths; a pad name or vN(x,y) marks a point on that pad's centre or on a via; arc(x,y) is an arc through that point)
3V3: length 63.7
  TOP w0.203: U6.14 35.56,47.65 40.56,42.65 v1(40.56,33.59)
  TOP w0.635: C42.1 17.69,19.88 17.94,19.62 C41.1 19.56,19.62 19.61,19.67 C20.1 ; v1(28.17,16.92) 27.14,17.95 27.14,18.99 26.44,19.69 C23.1 C22.1 24.28,19.69 24.26,19.66 C21.1 21.93,19.66 21.92,19.67 C20.1 ; C20.1 20.6,18.81 20.6,18.81 U4.4 20.6,14.18 v1(20.33,13.91)
  BOTTOM w0.203: v1(28.17,16.92) 28.17,29.06 32.7,33.59 v1(40.56,33.59)
  BOTTOM w0.381: R27.1 v1(20.33,13.91)
GND: length 592.7
  TOP w0.203: TVS1.2 66.55,3.76 ; TVS1.2 v1(67.08,3.38) ; TVS1.2 66.55,3 ; TVS1.2 66.17,3.38 ; R50.2 68.13,29.54 ; R50.2 v1(67.55,30.56) ; R50.2 66.97,29.54 ; v1(32.45,35.77) 33.33,36.65 U6.24 ; C62.2 v1(15.86,39.09) ; C62.2 v1(17.59,39.09) ; C62.2 v1(16.76,40.08) ; v1(29.07,38.85) 29.07,38.85 U6.22 ; v1(23.81,29.61) 23.81,28.49 23.36,28.03 C33.2 ; 62.51,7.19 R5.2 63.68,7.19 ; C16.2 v1(29.32,9.21) ; C16.2 29.91,10.4 ; C16.2 28.74,10.4 ; SW2.2 42.7,71.02 ; SW2.2 41.77,71.95 ; SW2.2 41.77,70.09 ; SW2.2 40.84,71.02 ; C19.2 53.64,21.02 ; C19.2 52.48,21.02 ; C19.2 v1(53.06,22.14) ; U6.12 v1(46.05,48.75) ; 9.7,9.19 TVS10.2 8.58,9.19 ; C14.2 33.77,8.7 ; C14.2 31.89,8.7 ; C14.2 32.83,8.68 ; C40.2 v1(28.31,48.9) ; C40.2 29.62,48.31 ; C40.2 29.62,49.48 ; 19.16,20.97 C41.2 17.99,20.97 ; Q6.E 64.64,43.91 v1(63.98,43.26) ; C45.2 v1(60.62,56.04) ; 24.33,21.03 C22.2 25.5,21.03 ; TVS4.2 v1(41.16,10.94) ; TVS4.2 41.72,11.58 ; TVS4.2 40.6,11.58 ; 69.07,15.37 R49.2 68.49,14.81 ; 40.31,65.9 C63.2 ; C63.2 v1(41.24,66.49) ; C63.2 40.31,67.07 ; 12.04,5.36 SW1.3 ; SW1.3 14.2,5.36 ; SW1.3 13.12,6.44 ; SW1.3 13.12,4.28 ; 17.31,26.48 C35.2 ; C35.2 v1(17.89,27.51) ; C35.2 18.48,26.48 ; 11.18,9.93 C55.2 10.01,9.93 ; J6.1 v1(12.94,39.22) ; J6.1 9.37,39.22 v1(9.28,39.31) ; J6.1 v1(11.18,40.5) ; 55.96,54.84 C47.2 ; C47.2 57.12,54.84 ; C47.2 v1(56.54,56.19) ; v1(29.3,17.1) 29.3,15.83 v1(27.51,15.83) ; v1(56.9,10.53) 56.9,12.08 57.07,12.26 C4.2 ; 54.42,24.48 HDR1.3 ; HDR1.3 53.48,25.42 ; HDR1.3 55.36,25.42 ; HDR1.3 54.42,26.36 ; v1(63.73,53.48) R31.2 v1(63.73,55.79) ; 34.94,68.52 SW2.3 ; SW2.3 36.02,69.6 ; SW2.3 37.1,68.52 ; SW2.3 36.02,67.44 ; v1(67.82,23.65) v1(66.79,24.68) ; v1(67.82,23.65) v1(68.83,23.65) ; v1(67.82,23.65) 68.83,24.67 v1(68.85,24.67) ; v1(67.82,23.65) v1(66.66,23.65) ; v1(67.82,23.65) 68.83,22.63 v1(68.83,22.6) ; v1(67.82,23.65) v1(67.82,22.6) ; v1(67.82,23.65) v1(67.82,24.68) ; v1(67.82,23.65) 66.79,22.62 v1(66.79,22.61) ; 50.68,51.01 C65.2 ; C65.2 50.68,52.17 ; C65.2 v1(51.82,51.59) ; C18.2 v1(54.88,22.84) ; C18.2 54.06,21.58 ; C18.2 55.69,21.58 ; 6.48,8.34 Q4.E 7.29,8.34 ; 56.18,21.59 C17.2 ; C17.2 v1(57,22.93) ; C17.2 57.81,21.59 ; HDR2.2 21.35,62.79 ; HDR2.2 19.47,62.79 ; HDR2.2 20.41,61.85 ; HDR2.2 20.41,63.73 ; 57.87,67.17 J1.6 ; J1.6 57.87,70.6 ; J1.6 59.58,68.89 ; J1.6 56.15,68.89 ; 64.95,3.95 TVS3.2 ; TVS3.2 65.25,3.38 v1(64.82,2.95) ; TVS3.2 65.56,3.95 ; J2.10 68.55,2.71 ; J2.10 67.82,1.63 ; J2.10 69.29,1.63 ; C46.2 v1(58.03,56.11) ; 53.61,65.19 C66.2 52.44,65.19 ; 43.65,10.77 C11.2 44.82,10.77 ; 34.3,8.7 C13.2 ; C13.2 35.24,7.89 ; C13.2 35.27,8.7 ; J2.11 62.69,1.63 ; J2.11 61.22,1.63 ; J2.11 61.95,2.71 ; R18.2 v1(72.67,19.5) ; R18.2 73.25,18.4 ; R18.2 72.08,18.4 ; U6.13 35.96,48.75 ; U6.13 34.77,49.28 ; U6.13 v1(32.85,48.75) ; 40.39,7.75 R22.2 39.22,7.75 ; v1(11.09,29.81) C37.2 v1(9.45,28.21) ; 5.83,11.62 TVS9.2 ; TVS9.2 6.95,11.62 ; TVS9.2 v1(6.39,12.26) ; TVS6.2 41.52,18.96 ; TVS6.2 v1(41.21,18.16) ; TVS6.2 40.91,18.96 ; Q10.E 64.98,39.09 v1(64.67,39.4) ; 25.81,23.94 C27.2 24.64,23.94 ; U6.21 33.54,39.95 32.99,39.4 v1(28.51,39.4) ; 25.83,21.03 C23.2 27,21.03 ; 44.08,18.96 TVS7.2 43.78,18.59 ; v1(22.29,1.84) 22.29,2.33 22.3,2.34 ; 57.92,24.58 C1.2 ; C1.2 59.09,24.58 ; C1.2 v1(58.51,25.62) ; C26.2 v1(33.17,16.27) ; C26.2 32.59,15.28 ; C26.2 33.76,15.28 ; v1(59.19,10.49) 59.19,11.97 58.9,12.26 C4.2 ; TVS2.2 65.9,3.13 v1(65.65,2.87) ; TVS2.2 65.59,3.95 ; TVS2.2 66.2,3.95 ; C33.2 21.75,28.03 21.55,28.24 v1(21.55,29.7) ; C33.2 v1(22.72,29.61) ; C54.2 v1(6.37,15.4) ; C4.2 v1(58.03,10.53) ; 14,28.06 v1(15.95,28.06) ; 14,28.06 v1(15.36,29.42) ; 14,28.06 C36.2 ; 68.53,16.37 C7.2 70.15,16.37 ; 37.08,18.96 TVS8.2 ; TVS8.2 v1(37.39,18.13) ; TVS8.2 37.69,18.96 ; J6.3 v1(11.18,34.97) ; J6.3 v1(9.27,36.27) ; J6.3 v1(12.88,36.27) ; 47.77,36.12 U6.1 ; U6.1 v1(46.09,36.65) ; U6.1 48.96,36.65 ; 11.5,5.78 Q9.E 10.68,5.78 ; v1(54.51,13.03) 54.51,13.52 55.2,14.21 55.41,14.21 ; 55.41,14.21 v1(55.41,13) ; 55.41,14.21 Q3.S ; C34.2 v1(16.38,27.49) ; C34.2 15.8,26.49 ; C34.2 16.97,26.49 ; Q8.E v1(65.25,48.79) ; Q8.E 65.96,48.38 ; Q8.E 65.96,49.2 ; C28.2 v1(19.85,29.63) ; C28.2 v1(18.43,28.2) ; C28.2 v1(21.02,28.2) ; 46.16,9.1 C10.2 ; C10.2 46.29,8.28 ; C10.2 47.23,9.1 ; v1(64.35,22.47) 64.78,22.9 U2.17 ; 65.91,41.12 Q5.E ; Q5.E 65.91,41.93 ; Q5.E 65.27,41.53 v1(64.87,41.13) ; 47.27,32.57 C31.2 ; C31.2 v1(47.85,33.68) ; C31.2 48.44,32.57 ; 37.79,9.13 D4.A 37.01,8.5 ; 43.02,67.44 SW2.4 ; SW2.4 44.1,68.52 ; SW2.4 41.94,68.52 ; SW2.4 43.02,69.6 ; TVS11.2 v1(37.34,63.46) ; TVS11.2 38.32,64.02 ; TVS11.2 38.32,62.91 ; R19.2 64.16,20.6 ; R19.2 v1(63.58,21.61) ; R19.2 62.99,20.6 ; 42.07,10.77 C12.2 43.24,10.77 ; 69.29,68.89 J1.5 ; J1.5 71.01,67.17 ; J1.5 72.72,68.89 ; J1.5 71.01,70.6 ; C8.2 57.62,28.07 ; C8.2 57.62,26.44 ; C8.2 v1(56.27,27.26) ; v1(65,45.98) 65.35,46.33 Q7.E ; Q7.E 65.91,46.73 ; Q7.E 65.91,45.92 ; 21.59,15.89 U4.3 23.01,15.89 ; Q3.S 55.41,15.22 ; Q3.S 54.72,14.33 ; C15.2 v1(30.82,9.21) ; C15.2 30.24,10.4 ; C15.2 31.41,10.4 ; C61.2 v1(21.41,39.96) ; C61.2 v1(22.21,39.09) ; C61.2 v1(20.48,39.09) ; 48.72,32.53 C30.2 ; C30.2 v1(49.3,33.85) ; C30.2 49.88,32.53 ; 12.43,28.06 C36.2 ; C36.2 v1(13.96,29.76) ; C36.2 13.96,27.23 ; v1(31.38,17.2) 31.38,15.83 31.44,15.83 v1(32.66,17.04) ; U7.4 v1(67.96,54.85) ; 52.89,10.66 R51.2 54.06,10.66 ; U8.4 57.36,48.91 57.69,48.58 59.08,48.58 59.44,48.22 v1(59.44,47.74) ; v1(64.58,21.82) 65.16,22.4 U2.18 ; TVS5.2 38.99,18.96 ; TVS5.2 38.38,18.96 ; TVS5.2 v1(38.68,18.09) ; 5.03,5.36 SW1.4 ; SW1.4 6.11,4.28 ; SW1.4 6.11,6.44 ; 26.19,23.95 C32.2 27.35,23.95 ; 54.22,65.19 C48.2 55.38,65.19 ; Q11.E v1(40.39,57.55) ; v1(61.63,11.57) 61.63,12.44 60.87,13.2 C3.2 v1(60.79,11.62)
  TOP w0.254: v1(9.45,7.11) C60.2 8.51,7.93 v1(8.08,8.36) ; C55.2 v1(10.59,10.95) ; Q9.E v1(11.09,4.94) ; TVS10.2 v1(9.14,9.97) ; v1(7.25,7.41) 6.89,7.77 Q4.E
  TOP w0.381: C21.2 v1(22.92,23.93) ; C21.2 23.04,22.71 23.65,23.32 v1(23.65,24.01) ; C21.2 22.78,22.71 22.19,23.31 v1(22.19,23.98) ; D4.A 37.11,7.81 v1(37.11,7.29) ; D4.A 37.79,7.78 37.79,7.77 v1(37.79,7.21) ; D4.A 37.81,8.5 38.56,7.75 v1(38.56,7.2) ; C39.2 v1(29.68,51.45) ; C39.2 v1(31.09,52.91) ; C39.2 v1(31.09,50.14) ; C20.2 20.61,22.72 21.44,23.55 v1(21.44,23.97) ; C20.2 20.46,22.72 19.8,23.38 v1(19.8,23.93) ; C20.2 v1(20.6,23.94) ; v1(31.63,7.48) 32.83,8.68 v1(32.83,7.5) ; v1(42.76,18.3) 43.42,18.96 TVS7.2 ; 67,13.69 C6.2 v1(67.12,12.59) ; 67,13.69 v1(65.8,12.49) ; 67,13.69 v1(65.89,13.69) ; C7.2 69.34,15.08 R49.2 69.98,14.81 69.99,14.8 C5.2 72.38,14.8 v1(73.21,13.96) ; R9.2 v1(66.55,12.16) ; v1(36.45,7.52) 35.27,8.7 v1(36.47,8.7) ; v1(60.94,68.44) J1.4 v1(60.94,62.42) ; R5.2 v1(63.09,6.3) ; v1(44.98,9.1) 46.16,9.1 v1(44.98,7.91) ; C11.2 v1(44.23,9.83) ; C12.2 v1(42.66,9.78) ; C48.2 v1(54.8,66.54) ; R51.2 v1(53.48,9.68) ; R22.2 v1(39.8,6.53) ; C66.2 v1(53.02,66.6) ; v1(49.14,7.66) C9.2 v1(50.67,9.1)
  TOP w0.635: U4.6 v1(22.3,10.75) ; U4.6 21.73,6.3 v1(17.28,1.86) ; U4.6 22.83,6.3 v1(27.3,1.83) ; v1(27.32,10.77) 22.85,6.3 v1(27.47,6.3) ; C27.2 v1(25.22,23.19) ; v1(22.3,13.86) U4.3 v1(22.3,17.45) ; C22.2 v1(24.92,22.02) ; v1(17.23,10.72) 21.65,6.3 v1(17.18,6.3) ; C41.2 v1(18.58,21.97) ; v1(22.3,6.28) 22.3,1.86 v1(22.29,1.84) ; C42.2 v1(16.65,23.02) ; C42.2 v1(15.53,21.78) ; C42.2 v1(17.78,21.78) ; C23.2 v1(26.42,21.96) ; C32.2 v1(26.77,23.08)
  L2_GND w0.203: SW1.3 13.12,6.44 ; SW1.3 13.12,4.28 ; SW1.3 14.2,5.36 ; SW1.3 12.04,5.36 ; 54.42,24.48 HDR1.3 ; HDR1.3 54.42,26.36 ; HDR1.3 53.48,25.42 ; HDR1.3 55.36,25.42 ; 5.03,5.36 SW1.4 ; SW1.4 7.19,5.36 ; SW1.4 6.11,4.28 ; SW1.4 6.11,6.44 ; 34.94,68.52 SW2.3 ; SW2.3 37.1,68.52 ; SW2.3 36.02,69.6 ; SW2.3 36.02,67.44 ; 67.82,1.63 J2.10 ; J2.10 68.55,2.71 ; J2.10 69.29,1.63 ; 19.47,62.79 HDR2.2 ; HDR2.2 21.35,62.79 ; HDR2.2 20.41,61.85 ; HDR2.2 20.41,63.73 ; 40.84,71.02 SW2.2 ; SW2.2 41.77,70.09 ; SW2.2 42.7,71.02 ; SW2.2 41.77,71.95 ; 69.29,68.89 J1.5 ; J1.5 72.72,68.89 ; J1.5 71.01,67.17 ; J1.5 71.01,70.6 ; 43.02,67.44 SW2.4 ; SW2.4 44.1,68.52 ; SW2.4 43.02,69.6 ; SW2.4 41.94,68.52 ; 61.22,1.63 J2.11 ; J2.11 61.95,2.71 ; J2.11 62.69,1.63 ; 56.15,68.89 J1.6 ; J1.6 59.58,68.89 ; J1.6 57.87,70.6 ; J1.6 57.87,67.17
  BOTTOM w0.203: 55.83,50.02 U5.65 ; U5.65 60.25,50.02 61.3,51.07 v1(61.3,51.21) ; U5.65 56.91,50.5 ; 50.82,29.42 U5.1 ; U5.1 v1(51.31,27.61) ; U5.1 51.31,30.5 ; U5.1 51.79,29.42 ; 71.01,67.17 J1.5 ; J1.5 69.29,68.89 ; J1.5 72.72,68.89 ; J1.5 71.01,70.6 ; J5.1 v1(48.83,76.81) ; J5.1 v1(48.83,73.43) ; J5.1 v1(47.5,75.07) ; C52.2 38.77,26.16 38.78,26.15 C53.2 40.4,26.15 v1(40.92,25.63) ; 57.87,67.17 J1.6 ; J1.6 57.87,70.6 ; J1.6 59.58,68.89 ; J1.6 56.15,68.89 ; C59.2 v1(51.65,69.47) ; C59.2 v1(51.65,71.61) ; C59.2 v1(52.81,70.56) ; U5.10 v1(42.31,30.74) ; U5.41 v1(32.31,61.2) ; v1(58.76,51.98) 58.76,51.27 58.51,51.02 U5.64 ; U5.2 v1(50.31,27.84) ; U5.2 50.79,29.42 ; U5.2 50.31,30.5 ; 40.84,71.02 SW2.2 ; SW2.2 41.77,71.95 ; SW2.2 42.7,71.02 ; SW2.2 41.77,70.09 ; HDR1.3 54.42,26.36 ; HDR1.3 53.48,25.42 ; HDR1.3 55.36,25.42 ; HDR1.3 54.42,24.48 ; J4.1 v1(29.83,76.73) ; J4.1 v1(28.37,75.02) ; J4.1 v1(29.83,73.32) ; U5.40 v1(28.51,54.02) ; J5.3 v1(53.01,75.07) ; J5.3 v1(51.78,76.92) ; J5.3 v1(51.78,73.4) ; SW1.3 14.2,5.36 ; SW1.3 13.12,6.44 ; SW1.3 12.04,5.36 ; SW1.3 13.12,4.28 ; U5.64 55.83,51.02 ; U5.64 56.91,50.53 ; U5.43 v1(34.31,61.13) ; J4.3 v1(32.78,76.7) ; J4.3 v1(32.78,73.32) ; J4.3 v1(33.88,75.02) ; 46.43,15.28 v1(45.35,16.36) ; 46.43,15.28 J3.G1 ; 46.43,15.28 v1(45.25,15.28) ; 46.44,14.2 J3.G1 ; J3.G1 47.28,15.28 ; J3.G1 v1(46.44,16.63) ; U5.80 v1(55.43,35.02) ; 30.82,29.42 U5.81 ; U5.81 31.31,28.34 ; U5.81 v1(31.31,30.83) ; U5.60 v1(51.31,61.27) ; 67.82,1.63 J2.10 ; J2.10 68.55,2.71 ; J2.10 69.29,1.63 ; v1(35.93,6.48) J3.G3 v1(33.45,6.48) ; C51.2 v1(35.58,27.1) ; 30.21,22.95 C50.2 ; C50.2 v1(30.8,22.1) ; C50.2 31.38,22.95 ; 31.74,22.96 C49.2 ; C49.2 v1(32.32,22.11) ; C49.2 32.9,22.96 ; 34.75,15.28 v1(35.83,16.36) ; 34.75,15.28 J3.G2 ; 34.75,15.28 v1(35.94,15.28) ; 5.03,5.36 SW1.4 ; SW1.4 6.11,4.28 ; SW1.4 6.11,6.44 ; SW1.4 7.19,5.36 ; 34.94,68.52 SW2.3 ; SW2.3 36.02,69.6 ; SW2.3 37.1,68.52 ; SW2.3 36.02,67.44 ; U5.57 v1(48.31,61.18) ; C56.2 v1(33.46,67.13) ; C56.2 v1(32.65,66.11) ; C56.2 v1(32.65,68.25) ; U5.58 v1(49.31,61.2) ; C58.2 v1(47.9,65.88) ; C58.2 v1(48.96,67.07) ; C58.2 v1(48.96,64.89) ; J3.C5 v1(42.49,20.48) ; 19.47,62.79 HDR2.2 ; HDR2.2 20.41,63.73 ; HDR2.2 20.41,61.85 ; HDR2.2 21.35,62.79 ; v1(62.24,71.48) R3.1 v1(63.46,72.82) ; J3.G2 34.74,14.2 ; J3.G2 33.9,15.28 ; J3.G2 v1(34.74,16.77) ; v1(15.94,13.99) R28.2 v1(15.94,11.83) ; U5.61 59.05,54.02 59.26,53.81 v1(59.26,52.63) ; v1(66.6,71.49) R2.1 v1(65.44,72.72) ; 61.22,1.63 J2.11 ; J2.11 62.69,1.63 ; J2.11 61.95,2.71 ; 43.02,67.44 SW2.4 ; SW2.4 43.02,69.6 ; SW2.4 41.94,68.52 ; SW2.4 44.1,68.52 ; v1(47.09,27.68) 47.31,27.89 U5.5 ; C57.2 v1(32.65,72.46) ; C57.2 v1(33.45,71.45) ; C57.2 v1(32.65,70.36) ; 63.95,3.44 J2.5 63.57,4.3 ; U5.77 v1(55.42,38.02) ; U5.14 v1(38.31,27.92) ; U5.37 v1(28.66,51.02) ; U5.78 v1(55.43,37.02)
  BOTTOM w0.381: J2.7 63.27,4.05 v1(63.27,4.05) ; J2.7 v1(62.05,5.11) ; J2.7 v1(60.68,4.05) ; J2.6 v1(68.45,5.09) ; J2.6 v1(67.27,4.05) ; J2.6 v1(69.77,4.05) ; v1(65.65,2.87) 65.65,1.83 65.85,1.63 J2.8 ; J2.8 67.06,1.63 67.27,1.84 v1(67.27,2.82) ; J2.8 v1(66.45,2.82) ; J2.5 v1(63.95,5.33) ; v1(63.27,2.96) 63.27,1.88 63.52,1.63 J2.9 ; v1(64.82,2.95) 64.82,1.93 64.52,1.63 J2.9 ; J2.9 v1(64.05,2.98)
VBAT: length 36.4
  TOP w0.203: R46.1 v1(41.44,64.95) ; U8.6 55.76,53.13 v1(54.95,53.94) ; U7.8 v1(67.96,51.87) ; U2.14 64.22,24.4 62.24,26.38 v1(62.24,26.94) 64.28,24.9 U2.13 ; U8.16 v1(51.12,42.99)
  TOP w0.254: C8.1 v1(61.02,27.26) ; R12.1 v1(61.09,29.11) ; R13.1 v1(60.86,30.61) ; R14.1 v1(60.88,32.1)
  TOP w0.381: C48.1 v1(54.8,62.73) ; C66.1 v1(53.02,62.66)
  L3_PWR w0.203: SW1.1 12.79,2.87 ; SW1.1 10.94,2.87 ; SW1.1 11.86,3.8 ; SW1.1 11.86,1.95 ; HDR2.4 21.35,67.87 ; HDR2.4 19.47,67.87 ; HDR2.4 20.41,66.93 ; HDR2.4 20.41,68.81 ; 49.34,24.48 HDR1.1 ; HDR1.1 48.4,25.42 ; HDR1.1 49.34,26.36 ; HDR1.1 50.28,25.42
VDD_1V8: length 87.1
  TOP w0.203: v1(45.57,47.65) 46.05,47.65 46.05,47.65 U6.11 49.1,47.65 49.3,47.85 49.3,51.55 C65.1 46.11,51.59 45.99,51.46 v1(45.5,51.46) ; v1(51.41,55.03) 50.29,56.15 48.34,56.15 v1(47.2,55.02) TP1.1 ; v1(69.76,52.21) 69.09,52.88 U7.1
  TOP w0.381: C39.1 34.4,51.45 v1(34.42,51.46)
  BOTTOM w0.203: v1(47.2,55.02) 47.2,52.25 46.42,51.46 v1(45.5,51.46) 44.92,51.46 44.92,51.46 34.96,51.46 34.96,51.46 v1(34.42,51.46) ; v1(51.41,55.03) 52.72,55.03 56.76,59.07 66.45,59.07 69.76,55.76 v1(69.76,52.21) ; U5.15 37.31,31.06 37.95,31.7 41.36,31.7 42.73,33.07 42.73,46.84 43.55,47.65 v1(45.57,47.65)
VIN_SENSE: length 59.6
  TOP w0.203: R9.1 v1(59.96,9.92) ; v1(58.36,13.86) 56.73,13.86 56.27,14.32 56.27,16.62 56.92,17.27 57.85,17.27 58.75,18.18 v1(58.75,20.94) ; v1(55.87,23.03) 55.87,26.42 53.78,28.5 v1(53.78,29.92) ; U8.15 50.74,43.79 50.16,43.21 50.16,36.24 51.14,35.26 v1(54.01,35.26)
  TOP w0.381: R9.1 R48.2
  BOTTOM w0.203: v1(59.96,9.92) 59.96,12.26 v1(58.36,13.86) ; v1(55.87,23.03) 55.87,21.11 56.03,20.94 v1(58.75,20.94) ; v1(54.01,35.26) 54.01,32.95 54.2,32.76 55.88,32.76 56.5,32.13 56.5,30.34 56.08,29.92 v1(53.78,29.92)
BJT_NETLIGHT: length 1.4
  TOP w0.254: Q11.C 41.77,55.92 41.81,55.88 R43.2
BOOT_CFG0: length 6.2
  TOP w0.203: R52.1 52.36,56.01 v1(52.31,56.06)
  BOTTOM w0.203: v1(52.31,56.06) 52.31,56.77 52.31,56.77 U5.85 v1(52.31,61.27)
BOOT_CFG1: length 3.2
  TOP w0.203: R52.2 v1(54.82,55.06)
  BOTTOM w0.203: U5.87 55.78,55.02 55.74,55.06 v1(54.82,55.06)
BQ_BTST: length 3.1
  TOP w0.203: U2.21 67.57,20.09 67.58,20.08 v1(67.58,19.6)
  BOTTOM w0.254: C2.2 v1(67.58,19.6)
BQ_CE: length 37.1
  TOP w0.203: v1(66.28,28.93) 63.64,28.93 62.8,29.77 62.8,34.51 61.81,35.5 60.37,35.5 v1(59.77,34.89) ; U2.9 68.07,26.69 68.79,27.42 v1(68.79,28.04) ; v1(58.9,43.31) 58.9,47.04 58,47.95 56.65,47.95 56.01,48.59 U8.9
  BOTTOM w0.203: v1(58.9,43.31) 58.9,36.24 59.77,35.37 v1(59.77,34.89) ; v1(66.28,28.93) 67.91,28.93 v1(68.79,28.04)
BQ_ILIM: length 2.6
  TOP w0.203: U2.10 67.57,26.29 67.55,26.3 R50.1
BQ_INT: length 44.8
  TOP w0.203: v1(51.38,32.1) v1(57.15,32.1) R14.2 ; U2.7 69.07,26.29 70.31,27.52 v1(70.31,32.5) ; v1(54.17,45.35) 54.14,45.39 U8.13
  BOTTOM w0.203: v1(54.17,45.35) 54.17,43.22 50.02,39.08 50.02,33.45 v1(51.38,32.1) ; v1(57.15,32.1) 57.85,32.79 61.29,32.79 61.58,32.5 v1(70.31,32.5)
BQ_OTG: length 37.6
  TOP w0.203: v1(58.29,43.06) 58.29,46.88 57.78,47.39 56.44,47.39 56.04,47.79 U8.10 ; v1(69.49,33.16) 69.49,27.41 68.57,26.49 68.57,26.29 68.57,26.29 U2.8
  BOTTOM w0.203: v1(58.29,43.06) 58.29,35.02 58.33,34.99 59.64,33.68 61.16,33.68 61.39,33.46 61.39,33.45 61.68,33.16 v1(69.49,33.16)
BQ_PG: length 25.4
  TOP w0.203: R11.2 v1(62.05,18.07) ; U2.3 72.55,23.4 72.84,23.11 72.96,23.11 v1(73.3,22.77)
  BOTTOM w0.203: v1(62.05,18.07) 62.91,17.21 62.91,15.57 63.41,15.08 72.08,15.08 73.3,16.3 v1(73.3,22.77)
BQ_PG_LED: length 4.6
  TOP w0.254: D1.K 61.47,23.76 61.47,21.84 62.05,21.25 R11.1
BQ_PMID: length 10.1
  TOP w0.203: v1(69.09,19.62) 69.09,20.11 68.57,20.63 68.57,21.01 U2.23 ; C6.1 v1(65.35,16.74)
  BOTTOM w0.203: v1(69.09,19.62) 69.09,17.71 68.12,16.74 v1(65.35,16.74)
BQ_PSEL: length 20.3
  TOP w0.203: R19.1 v1(63.58,18.16) ; U2.2 71.37,22.9 71.52,22.75 71.52,22.74 v1(71.86,22.39)
  BOTTOM w0.203: v1(71.86,22.39) 71.86,21.91 71.87,21.91 71.87,16.08 71.47,15.69 64.1,15.69 63.58,16.21 v1(63.58,18.16)
BQ_QON: length 40.7
  TOP w0.203: U8.7 54.96,51.29 v1(54.96,51.3) ; v1(65.06,29.78) 63.45,31.4 63.45,35.56 62.9,36.11 59.1,36.11 56.01,39.21 v1(55.12,39.21) ; v1(65.06,26.83) 66.36,26.83 66.57,26.62 U2.12 ; v1(51.21,41.8) 51.21,41.01 v1(53.01,39.21)
  BOTTOM w0.203: v1(65.06,26.83) v1(65.06,29.78) ; v1(54.96,51.3) 53.25,51.3 52.36,50.41 52.36,42.95 v1(51.21,41.8) ; v1(53.01,39.21) v1(55.12,39.21)
BQ_REGN: length 5.8
  TOP w0.203: R16.1 70.53,18.4 70.41,18.28 C7.1 69.28,18.28 68.48,19.08 68.48,19.9 68.07,20.31 U2.22
BQ_SCL: length 53.1
  TOP w0.203: v1(55.89,29.11) v1(57.14,29.11) R12.2 ; U2.5 71.55,24.4 72.94,25.78 v1(72.94,31.24) ; v1(54.79,46.19) 53.84,46.19 53.84,46.19 U8.12
  BOTTOM w0.203: v1(55.89,29.11) 52.73,29.11 52.39,29.45 52.39,29.47 52.39,32.17 50.58,33.98 50.58,38.99 54.79,43.2 v1(54.79,46.19) ; v1(57.14,29.11) 57.75,29.72 61.02,29.72 62.55,31.24 v1(72.94,31.24)
BQ_SDA: length 49.7
  TOP w0.203: U8.11 53.84,46.99 53.98,47.13 v1(54.84,47.13) ; U2.6 70.98,24.9 71.94,25.86 v1(71.94,31.92) ; R13.2 v1(57.14,30.61) v1(55.84,30.61)
  BOTTOM w0.203: v1(57.14,30.61) 57.91,31.38 61.34,31.38 61.73,31.78 70.36,31.78 70.5,31.92 v1(71.94,31.92) ; v1(54.84,47.13) 55.42,46.55 55.42,43.07 51.12,38.76 51.12,34.09 54.6,30.61 v1(55.84,30.61)
BQ_STAT: length 30
  TOP w0.203: U2.4 73.26,23.9 73.27,23.89 73.27,23.82 73.76,23.32 v1(74.24,23.32) ; R10.2 v1(60.53,18.18)
  BOTTOM w0.203: v1(60.53,18.18) 61.01,18.18 62.18,17.01 62.18,15.31 63,14.48 72.76,14.48 74.24,15.96 74.24,22.84 74.24,22.84 v1(74.24,23.32)
BQ_STAT_LED: length 4.8
  TOP w0.254: R10.1 60.53,21.25 59.54,22.24 59.54,23.74 D2.K
BQ_SW: length 9.9
  TOP w0.203: U2.20 67.07,20.88 66.57,20.38 ; L1.1 63.82,16.64 66.23,19.05 v1(66.23,19.54)
  TOP w0.254: U2.19 66.57,20.38 66.23,20.04 v1(66.23,19.54)
  BOTTOM w0.254: C2.1 v1(66.23,19.54)
BQ_TS: length 42.7
  TOP w0.203: U2.11 67.07,27.18 66.71,27.54 v1(66.17,27.54) v1(63.4,27.54) ; v1(74.99,17.06) R18.1 R16.2
  BOTTOM w0.203: v1(74.99,17.06) 74.99,26.93 74.79,27.13 67.12,27.13 66.71,27.54 v1(66.17,27.54) ; v1(63.4,27.54) 63.4,27.05 62.57,26.23 58.01,26.23 55.66,23.88 52.39,23.88 51.88,24.39 HDR1.2
CHAR_OTG_DN: length 9.2
  TOP w0.203: 63.46,65.33 J1.3
  TOP w0.381: v1(63.44,62.6) 63.44,63.17 63.44,63.18 J1.3 63.44,68.13 63.44,68.13 v1(63.44,68.65)
  BOTTOM w0.203: v1(63.44,62.6) R1.2 ; v1(63.44,68.65) 63.44,70.11 R3.2 63.46,70.14
CHAR_OTG_DP: length 9.2
  TOP w0.381: v1(65.43,62.61) 65.43,63.19 65.44,63.19 J1.2 65.44,66.98 65.44,66.99 v1(65.44,68.6)
  BOTTOM w0.203: R2.2 v1(65.44,68.6) ; v1(65.43,62.61) R6.2
CLK_SIM: length 4.7
  TOP w0.203: v1(38.68,20.59) TVS5.1
  BOTTOM w0.203: R34.2 37.72,21.94 38.02,21.63 38.02,20.77 38.2,20.59 v1(38.68,20.59) J3.C3
DIV_ANT: length 7.9
  BOTTOM w0.61: R44.1 C58.1 50.3,65.04 50.31,65.04 U5.59
FET_CAP_G: length 8.5
  TOP w0.203: Q2.G 50.09,15.86 50.78,15.17 R26.1
  TOP w0.254: C64.2 49.29,21.03 49.02,20.77 49.02,18.07 50.09,17 Q2.G
FET_PW_G: length 10.3
  TOP w0.203: v1(52.28,22.18) 51.63,22.18 51.48,22.03 R23.2 ; R26.2 v1(51.87,17.57)
  TOP w0.254: R26.2 53.7,16.51 53.72,16.53 Q3.D
  BOTTOM w0.203: v1(52.28,22.18) 52.28,17.99 v1(51.87,17.57)
FXLA_OE: length 2.6
  TOP w0.203: R31.1 65.68,54.66 66.47,53.88 U7.5
IO_SIM: length 4.4
  TOP w0.203: TVS8.1 37.41,19.83 v1(37.41,20.61)
  BOTTOM w0.203: J3.C7 v1(37.41,20.61) 36.93,20.61 35.61,21.94 R35.2
LDO_3V3_ADJ: length 4.8
  TOP w0.635: U4.5 18.9,14.59 18.99,14.5 v1(18.99,13.99)
  BOTTOM w0.381: R28.1 17.89,12.89 17.91,12.88 R27.2 v1(18.99,13.99)
LED1: length 5.4
  TOP w0.254: Q5.B 65.32,42.53 64.77,41.98 63.22,41.98 62.21,42.99 U8.25
LED1_BJT: length 1.3
  TOP w0.254: Q5.C R37.2
LED1_K: length 1.6
  TOP w0.254: D5.K R37.1
LED2: length 4.9
  TOP w0.254: Q6.B 65.32,44.91 65,44.59 U8.27
LED2_BJT: length 1.3
  TOP w0.254: Q6.C R38.2
LED2_K: length 1.5
  TOP w0.254: R38.1 D6.K
LED3: length 5.6
  TOP w0.254: Q7.B 65.32,47.33 63.38,45.39 U8.28
LED3_BJT: length 1.4
  TOP w0.254: Q7.C R39.2
LED3_K: length 1.5
  TOP w0.254: D7.K R39.1
LED4: length 7.5
  TOP w0.254: U8.29 63.06,46.19 64.13,47.26 64.13,49.32 64.61,49.79 Q8.B
LED4_BJT: length 1.4
  TOP w0.254: Q8.C R40.2
LED4_K: length 1.5
  TOP w0.254: D8.K R40.1
LED_NETLIGHT: length 1.4
  TOP w0.254: R43.1 39.83,55.08 39.76,55.15 D9.K
LED_PW: length 1.7
  TOP w0.381: D3.K R22.1
LTE_ACTIVE: length 12.1
  TOP w0.203: R54.2 50.81,34.05 49.58,35.28 49.58,41.58 49.01,42.15 U6.6
LTE_FRAME_SYNC: length 24.9
  TOP w0.203: U6.5 45.19,41.05 44.09,39.96 44.09,33.9 42.44,32.25 32.61,32.25 30.83,34.03 R56.2
LTE_WLAN_PRIORITY: length 26.6
  TOP w0.203: v1(37.35,54.93) 31.52,54.93 31.48,54.97 R55.2 ; U6.7 40.73,43.25 37.35,46.63 v1(37.35,52.26)
  BOTTOM w0.203: v1(37.35,52.26) v1(37.35,54.93)
MAIN_ANT: length 9
  BOTTOM w0.61: U5.82 31.31,66.29 31.3,66.3 C56.1 R42.1
NETLIGHT: length 3.6
  TOP w0.203: Q11.B 42.76,57.55 42.79,57.52 v1(43.27,57.52)
  BOTTOM w0.203: v1(43.27,57.52) 42.31,58.48 U5.51 42.27,59.58
PC2_MCU: length 13.2
  TOP w0.203: TP6.1 63.64,36.73 59.52,36.73 55.76,40.5 U8.19
PC3_MCU: length 16
  TOP w0.203: TP5.1 66.7,37.29 59.83,37.29 56.56,40.56 U8.20
PC4_MCU: length 18.7
  TOP w0.203: U8.21 57.36,40.56 59.9,38.01 69.53,38.01 TP4.1
PC5_MCU: length 21.6
  TOP w0.203: TP3.1 72.6,38.47 60.24,38.47 58.16,40.56 U8.22
PD7_MCU: length 18
  TOP w0.203: TP8.1 70.23,56.94 63.8,56.94 62.67,55.82 62.67,51.98 62.18,51.49 62.18,49.08 61.68,48.59 U8.32
PE5_MCU: length 4.6
  TOP w0.203: U8.17 54.16,38.69 53.69,38.23 TP7.1
PF4_MCU: length 8.9
  TOP w0.203: U8.8 54.16,53.32 53.66,53.82 50.5,53.82 TP2.1
POWER_MCU: length 31.1
  TOP w0.203: U8.14 51.2,44.59 50.8,44.99 v1(50.8,49.93) ; v1(47.17,58.13) 42.73,62.56 42.73,66.22 40.94,68.01 R47.1
  BOTTOM w0.203: v1(50.8,49.93) 50.8,56.56 49.22,58.13 v1(47.17,58.13)
PW_BUTTON: length 8.3
  TOP w0.203: TVS11.1 38.97,64.31 38.98,64.32 R46.2 38.98,65.84 38.96,65.85 C63.1 38.96,67.35 38.94,67.38 R47.2 38.94,69.36 SW2.1
PWRKEY: length 38.2
  TOP w0.203: v1(55.19,28.23) 55.19,30.98 54.99,31.18 C30.1 49.3,30.57 49.31,30.56 v1(49.31,27.44) ; v1(68.73,39.59) Q10.C ; v1(67.26,34.09) 67.26,31.8 v1(65.87,30.42)
  BOTTOM w0.203: v1(65.87,30.42) 63.4,30.42 61.21,28.23 v1(55.19,28.23) ; v1(68.73,39.59) 67.26,38.12 v1(67.26,34.09) ; U5.3 v1(49.31,27.44)
PWRKEY_MCU: length 8.2
  TOP w0.203: U8.23 58.96,40.56 59.43,40.09 Q10.B
RESET: length 58.1
  TOP w0.203: v1(48.31,27.48) 47.85,27.94 C31.1 47.22,31.22 46.99,31.45 v1(26.19,31.45)
  TOP w0.305: R41.1 v1(12.15,22.32)
  BOTTOM w0.203: U5.4 v1(48.31,27.48) ; v1(12.15,22.32) 15.42,25.58 20.8,25.58 26.19,30.97 v1(26.19,31.45)
RESET_MCU: length 111.3
  TOP w0.203: v1(62.06,54.51) 62.06,52.81 61.07,51.82 61.05,51.82 60.69,51.46 60.69,51.44 59.76,50.51 U8.1 ; R36.1 v1(6.36,18.76) ; v1(40.21,53.86) 42.56,53.86 43.42,54.73 43.42,56.31 43.88,56.77 v1(55.64,56.77)
  BOTTOM w0.203: v1(40.21,53.86) 37.59,56.48 25.23,56.48 21.46,60.25 HDR2.1 20.41,58.59 23.91,55.08 23.91,36.86 18.06,31 9.33,31 6.36,28.03 v1(6.36,18.76) ; v1(55.64,56.77) 56.16,57.29 61.86,57.29 62.06,57.09 v1(62.06,54.51)
RF_ANT: length 14.9
  TOP w0.61: U6.23 33.34,37.75 33.34,37.75 C61.1 R45.1
RST_BUTTON: length 9.1
  TOP w0.203: Q4.B 5.89,7.49 7.61,5.77 8.48,5.77 ; 8.48,5.77 7.36,4.65 SW1.2 ; 8.48,5.77 C60.1 9.63,5.77 9.63,5.78 Q9.B
RST_MCU: length 10.2
  TOP w0.203: Q4.C TVS9.1
  TOP w0.254: 6.46,13.25 C54.1
  TOP w0.305: R36.2 7.05,16.31 7.42,15.94 7.42,13.69 6.97,13.25 6.46,13.25 7.16,13.25 7.47,12.94 7.47,11.39 7.05,10.97 TVS9.1
RST_SIM: length 4.8
  TOP w0.203: TVS6.1 41.22,19.82 v1(41.22,20.61)
  BOTTOM w0.203: R32.2 40.61,21.95 41.21,21.35 41.21,21.11 41.22,21.1 v1(41.22,20.61) J3.C2
RST_SIM7100: length 4.8
  TOP w0.203: Q9.C C55.1
  TOP w0.254: R41.2 11.52,8.61 11.49,8.59 C55.1 9.8,8.59 9.75,8.54 TVS10.1
RX_1V8: length 17
  TOP w0.203: v1(70.76,52.69) 70.08,53.38 U7.2
  BOTTOM w0.203: v1(70.76,52.69) 70.76,52.21 70.77,52.21 70.77,51.25 69.93,50.41 61.8,50.41 60.92,49.53 R29.1
RX_3V3: length 10.1
  TOP w0.203: U7.6 66.92,53.38 66.91,53.39 65.3,53.39 62.83,50.92 62.83,48.26 62.35,47.79 U8.31
SD2_CLK: length 24.7
  TOP w0.203: v1(30.25,40.71) 31.27,40.71 31.79,41.23 R53.2 ; U6.19 37.89,42.15 38.98,41.06 v1(38.98,36.39)
  BOTTOM w0.203: v1(38.98,36.39) 30.85,36.39 30.25,36.99 v1(30.25,40.71)
SD2_CMD: length 14.3
  TOP w0.203: U6.20 33.54,41.05 32.51,40.02 26.16,40.02 24.95,41.23 v1(24.95,43.02)
  BOTTOM w0.203: U5.29 25.58,43.02 25.58,43.02 v1(24.95,43.02)
SD2_D0: length 8.8
  TOP w0.203: U6.18 32.47,43.25 31.81,43.91 29.53,43.91 v1(28.97,43.35)
  BOTTOM w0.203: v1(28.97,43.35) 28.3,44.02 U5.30
SD2_D1: length 11.1
  TOP w0.203: v1(28.23,41.01) 28.23,43.8 28.79,44.36 32,44.36 32.02,44.35 U6.17
  BOTTOM w0.203: U5.27 28.23,41.02 v1(28.23,41.01)
SD2_D2: length 11.7
  TOP w0.203: U6.16 30.02,45.45 29.8,45.23 v1(29.31,45.23)
  BOTTOM w0.203: U5.28 29.39,42.02 29.7,42.33 29.7,44.84 v1(29.31,45.23)
SD2_D3: length 26.2
  TOP w0.203: 32.2,46.55 U6.15 36.02,46.55 39.76,42.8 v1(39.76,32.98) ; 32.2,46.55 28.53,46.55 28.1,46.13 v1(28.1,45.02) ; 32.2,46.55 32.19,46.55 31.71,46.55
  BOTTOM w0.203: U5.31 v1(28.1,45.02)
SIG_DIV_ANT: length 4.7
  BOTTOM w0.61: J5.2 C59.1 R44.2
SIG_MAIN_ANT: length 3.5
  BOTTOM w0.61: J4.2 C57.1 R42.2
SIG_WIFI_ANT: length 5.8
  TOP w0.61: R45.2 C62.1 J6.2
SIM7100_COEX1: length 2.8
  TOP w0.203: R55.1 v1(28.23,54.97)
  BOTTOM w0.203: v1(28.23,54.97) 26.76,54.97 U5.83
SIM7100_COEX2: length 2.8
  TOP w0.203: R56.1 29.45,34.01 v1(28.46,34.01)
  BOTTOM w0.203: U5.84 27.97,34.02 27.98,34.01 v1(28.46,34.01)
SIM7100_COEX3: length 2.7
  TOP w0.203: R54.1 v1(55.28,34.05)
  BOTTOM w0.203: v1(55.28,34.05) 56.87,34.05 U5.86
SWIM_MCU: length 86.6
  TOP w0.203: HDR2.3 22.33,65.33 29.3,58.36 44.75,58.36 45.72,57.39 v1(53.26,57.39) ; U8.26 62.19,43.79 63.39,42.59 64.54,42.59 65.16,43.21 v1(71.63,43.21)
  BOTTOM w0.203: v1(53.26,57.39) 56.78,60.91 71.75,60.91 73.53,59.13 73.53,45.11 v1(71.63,43.21)
TX_1V8: length 22.4
  TOP w0.203: v1(72.24,53.88) 69,53.88 68.99,53.88 U7.3
  BOTTOM w0.203: v1(72.24,53.88) 72.24,45.81 70.45,44.02 R30.1
TX_3V3: length 10.1
  TOP w0.203: 66.73,52.88 U7.7
  TOP w0.254: 66.73,52.88 66.25,52.88 63.46,50.09 63.46,47.56 62.88,46.99 U8.30
UART_RX: length 6.5
  BOTTOM w0.203: U5.68 58.75,47.02 59.69,46.08 61.98,46.08 62.27,46.37 R29.2
UART_TX: length 4.1
  BOTTOM w0.203: R30.2 60.39,44.02 60.38,44.02 U5.71
USB_DN: length 44.1
  BOTTOM w0.203: U1.3 65.96,9.86 65.75,10.06 64.81,10.06 64.6,9.86 64.6,9.77 64.6,9.77 64.6,8.9 64,8.3 53.8,8.3 50.28,11.81 47.24,11.81 44.42,14.63 44.42,16.3 45.86,17.73 45.86,21.3 45.15,22.01 45.15,23.66 40.79,28.02 40.51,28.02 40.31,28.22 U5.12
USB_DN_CONN: length 3.8
  TOP w0.254: v1(65.9,5.59) 65.9,5.59 65.9,4.79 TVS2.1
  BOTTOM w0.254: U1.4 65.91,7.21 65.91,6.44 65.9,6.43 v1(65.9,5.59) 65.9,5.59 J2.2
USB_DP: length 43.5
  BOTTOM w0.203: U1.2 65.16,8.81 64.19,7.84 53.99,7.84 53.61,7.84 50.09,11.36 46.77,11.36 43.81,14.32 43.81,16.39 45.22,17.8 45.22,21.06 44.59,21.69 44.59,23.5 40.6,27.49 39.58,27.49 39.31,27.76 U5.13
USB_DP_CONN: length 3.8
  TOP w0.254: v1(65.25,5.59) TVS3.1
  BOTTOM w0.254: J2.3 v1(65.25,5.59) 65.25,6.39 65.24,6.41 65.24,7.17 U1.1
USB_ID: length 46.3
  TOP w0.203: v1(53.55,7.22) 61.14,7.22 62.46,8.54 R5.1
  TOP w0.254: R5.1 R4.1
  BOTTOM w0.203: U5.16 36.31,27.49 36.87,26.93 40.49,26.93 44.03,23.38 44.03,21.33 44.63,20.73 44.63,18.07 43.24,16.69 43.24,14.04 46.38,10.9 49.87,10.9 v1(53.55,7.22)
USB_ID_CONN: length 2.9
  TOP w0.203: R4.2 v1(64.6,6.2)
  BOTTOM w0.203: J2.4 64.6,4.31 v1(64.6,6.2)
USB_VDD5V: length 8.5
  TOP w0.254: TVS1.1 v1(66.55,5.58)
  TOP w0.381: D10.A v1(67.59,7.12) ; D10.A v1(69.06,5.93) ; D10.A v1(70.66,7.12) ; R48.1 v1(66.55,6.29)
  BOTTOM w0.254: J2.1 66.55,4.31 v1(66.55,5.58)
  BOTTOM w0.381: U5.11 v1(41.31,30.72)
USIM_CLK: length 11.4
  TOP w0.203: v1(38.18,24.87) 38.18,26.75 37.03,27.9 v1(33.31,27.9)
  BOTTOM w0.203: v1(38.18,24.87) 37.16,24.87 C52.1 37.11,23.92 37.08,23.89 R34.1 ; U5.19 v1(33.31,27.9)
USIM_DATA: length 7.1
  BOTTOM w0.203: R35.1 C51.1 34.95,24.82 34.76,25 34.76,27.64 35.31,28.19 U5.17
USIM_RST: length 16.2
  TOP w0.203: v1(40.98,24.34) 40.14,23.49 v1(34.31,23.49)
  BOTTOM w0.203: U5.18 v1(34.31,23.49) ; R32.1 C53.1 40.51,24.81 v1(40.98,24.34)
USIM_VDD: length 30.6
  TOP w0.381: v1(35.2,20.59) 35.2,21.52 35.58,21.9 42.43,21.9 v1(43.76,20.56) 43.76,19.82 TVS7.1 ; R33.1 39.95,17.57 40.42,17.1 42.06,17.1 v1(42.47,17.5)
  BOTTOM w0.203: v1(43.76,20.56) J3.C1 43.76,18.29 42.98,17.5 v1(42.47,17.5)
  BOTTOM w0.254: C49.1 32.32,24.95 32.31,24.96 U5.20
  BOTTOM w0.381: C50.1 31.65,24.3 31.66,24.31 C49.1 33.35,24.31 33.51,24.15 33.51,22.28 v1(35.2,20.59)
V_SIM7100: length 97.5
  TOP w0.254: C32.1 26.11,25.3 26.1,25.29 C27.1
  TOP w0.381: 39.72,53.02 40.02,52.71 v1(40.02,49.02) ; 39.72,53.02 D9.A 29.99,53.67 v1(29.33,53.02) ; 39.72,53.02 39.73,53.03 v1(53.06,53.03)
  TOP w0.635: v1(26.28,28.06) 26.77,27.56 C32.1 30.62,25.3 FB1.2 ; C27.1 24.56,25.29 24.41,25.13 C33.1 21.12,25.13 21.1,25.15 C28.1 18.83,25.15 18.82,25.14 C35.1 17.23,25.14 17.22,25.15 C34.1 15.72,25.15 15.71,25.16 C36.1 12.36,25.16 12.35,25.16 C37.1
  BOTTOM w0.203: v1(26.28,28.06) 32.84,34.62 40.55,34.62 41.87,35.94 41.87,47.17 v1(40.02,49.02)
  BOTTOM w0.254: U5.63 54.58,52.02 53.57,53.03 ; U5.62 53.87,53.02 53.86,53.03 53.57,53.03 ; v1(53.06,53.03) 53.57,53.03 ; U5.38 28.33,52.02 v1(29.33,53.02) U5.39
